# Altium PCB M2FS FLS Data Formatter 8_14_2012 centroid.PcbDoc (part 1 of 3)
Units mil, origin at the board's own origin, x right, y up, seen from the top; angles counter-clockwise.
Board outline 3350 x 3370 mil, 8 copper layers (Top Layer, Internal Plane 1, Mid-Layer 1, Mid-Layer 2, MidLayer3, Mid-Layer 4, Internal Plane 2, Bottom Layer); 141 components, 138 nets, 814 pads, 61 vias.
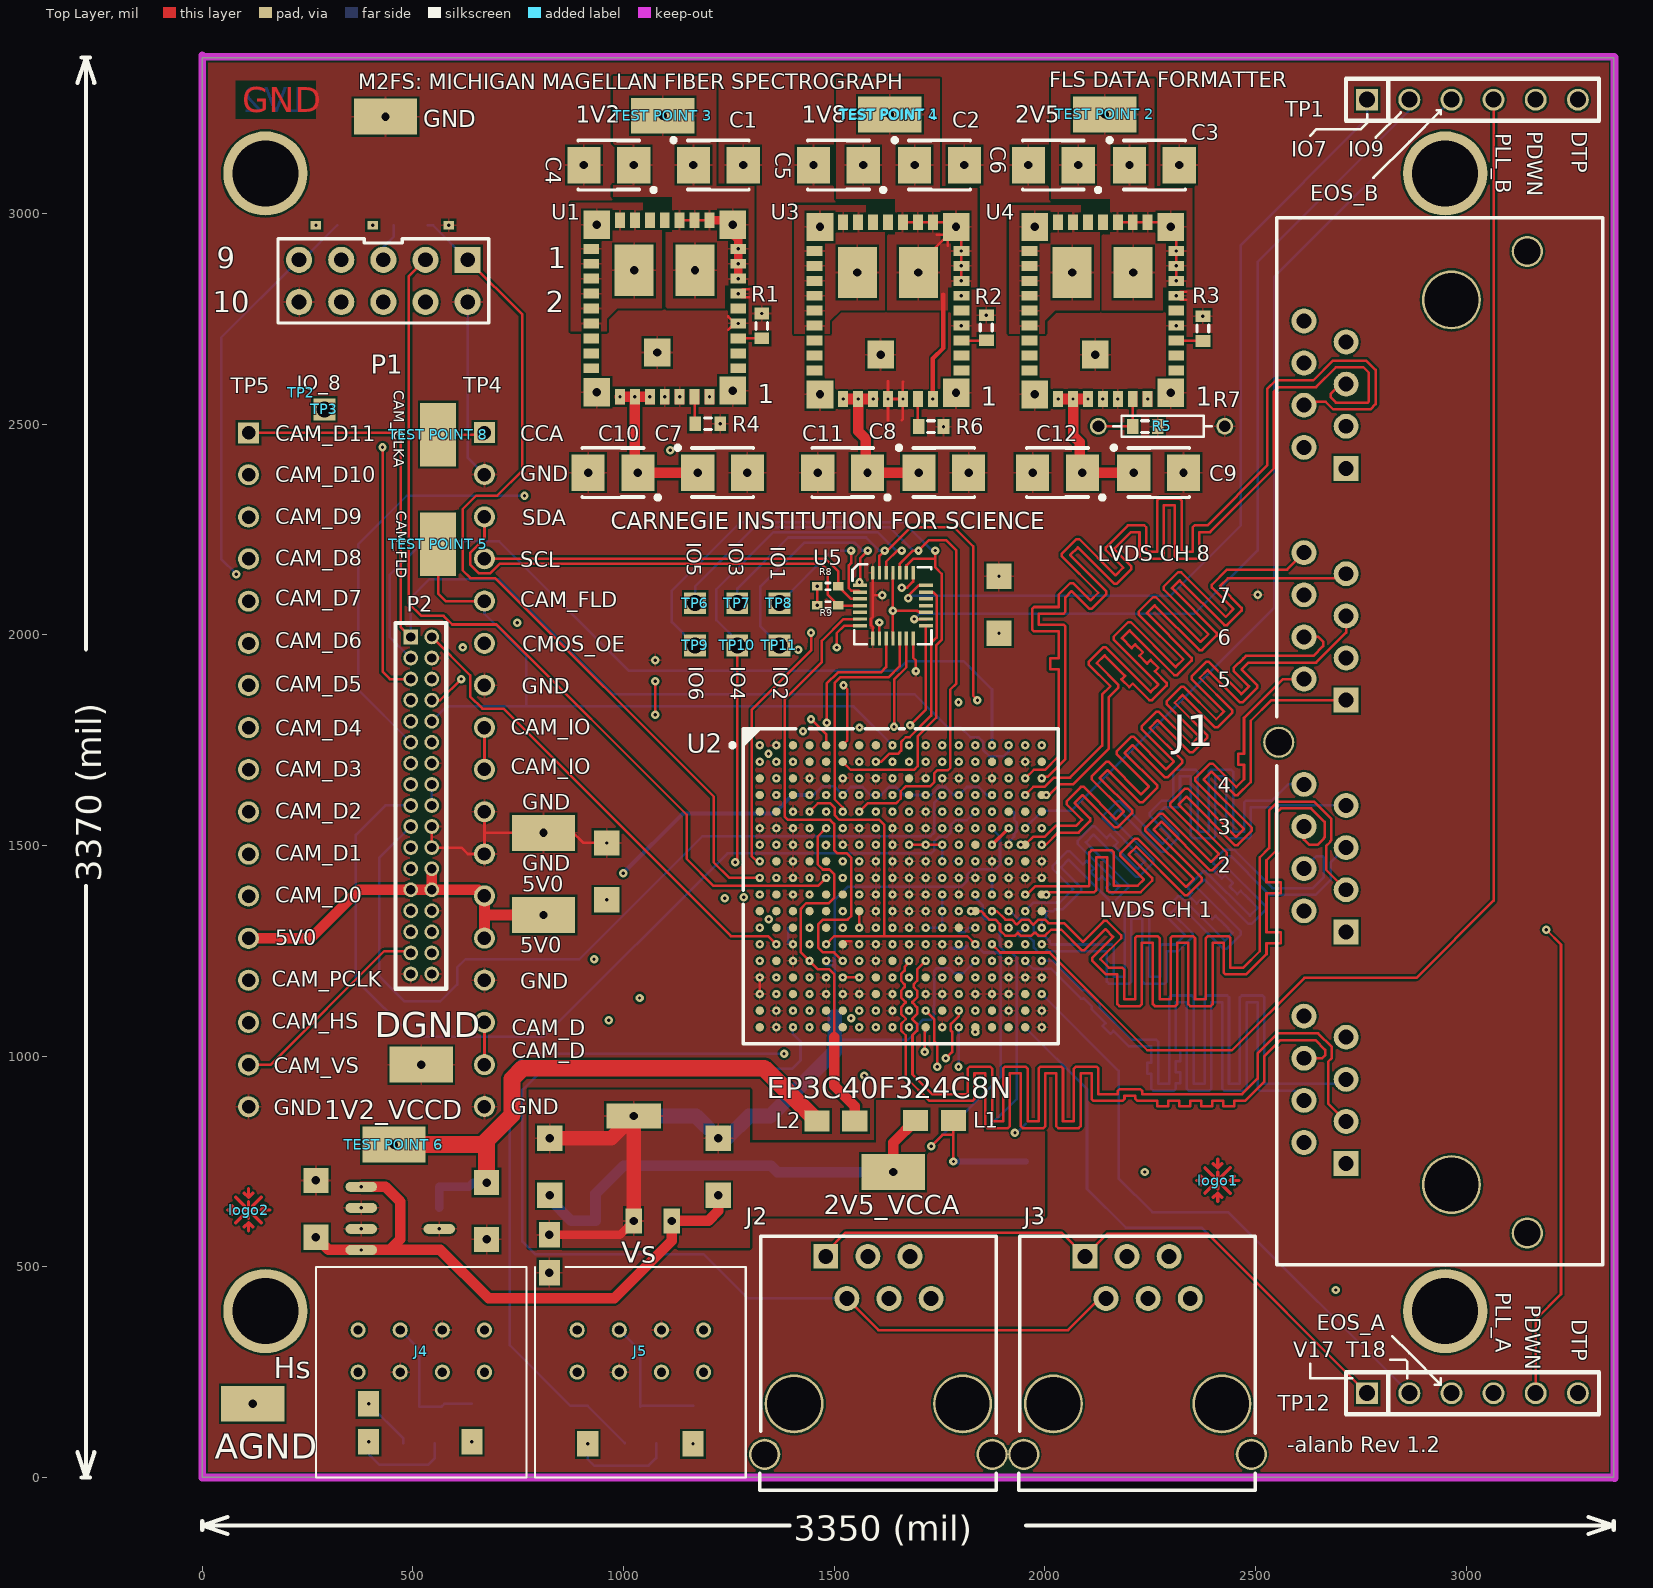
[diagram p0: Top Layer view]
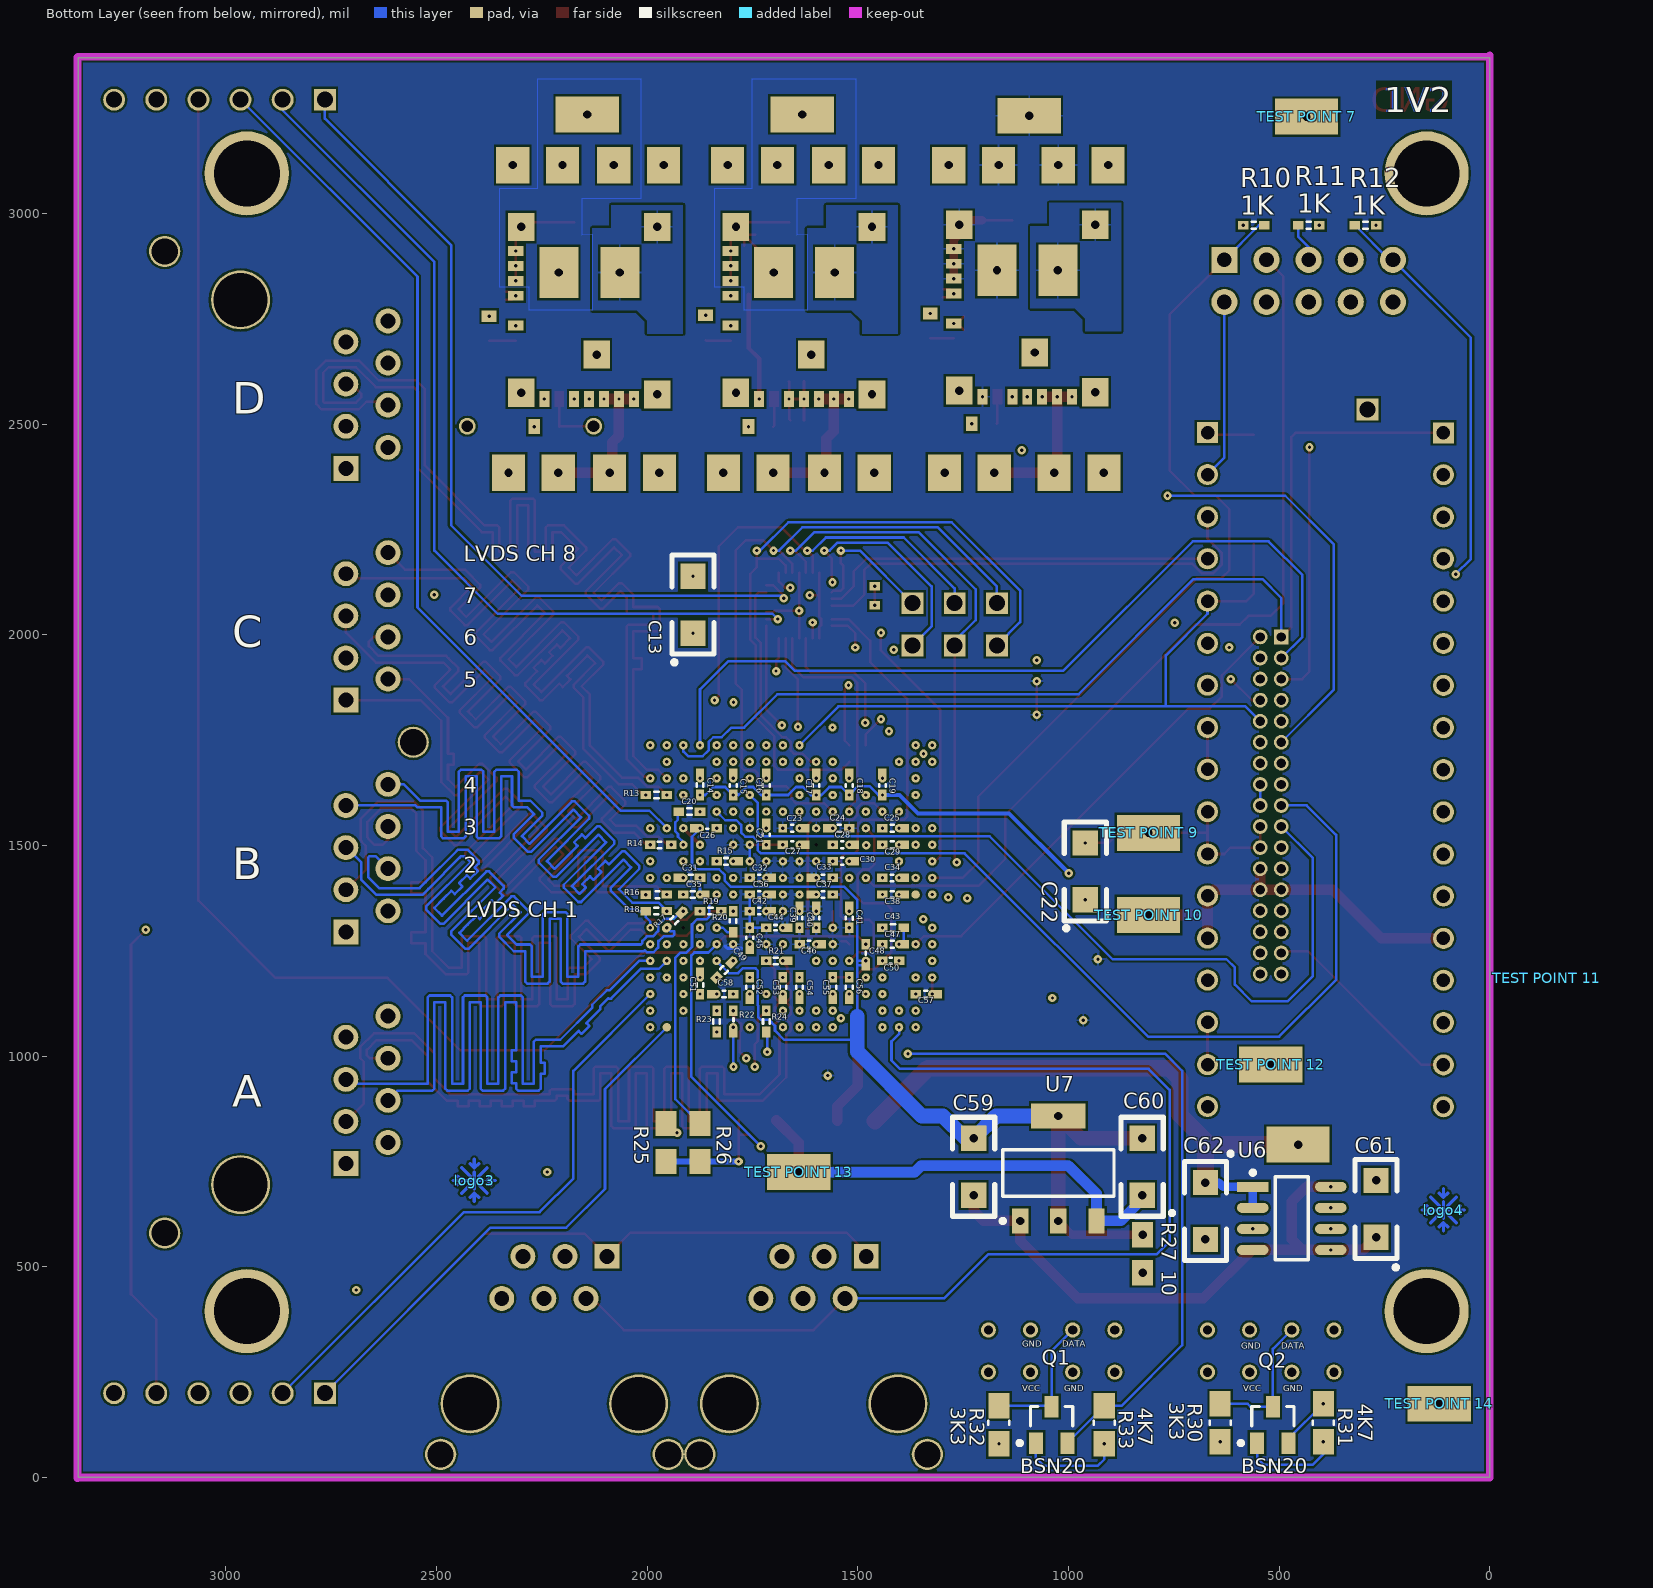
[diagram p1: Bottom Layer view, seen from below]
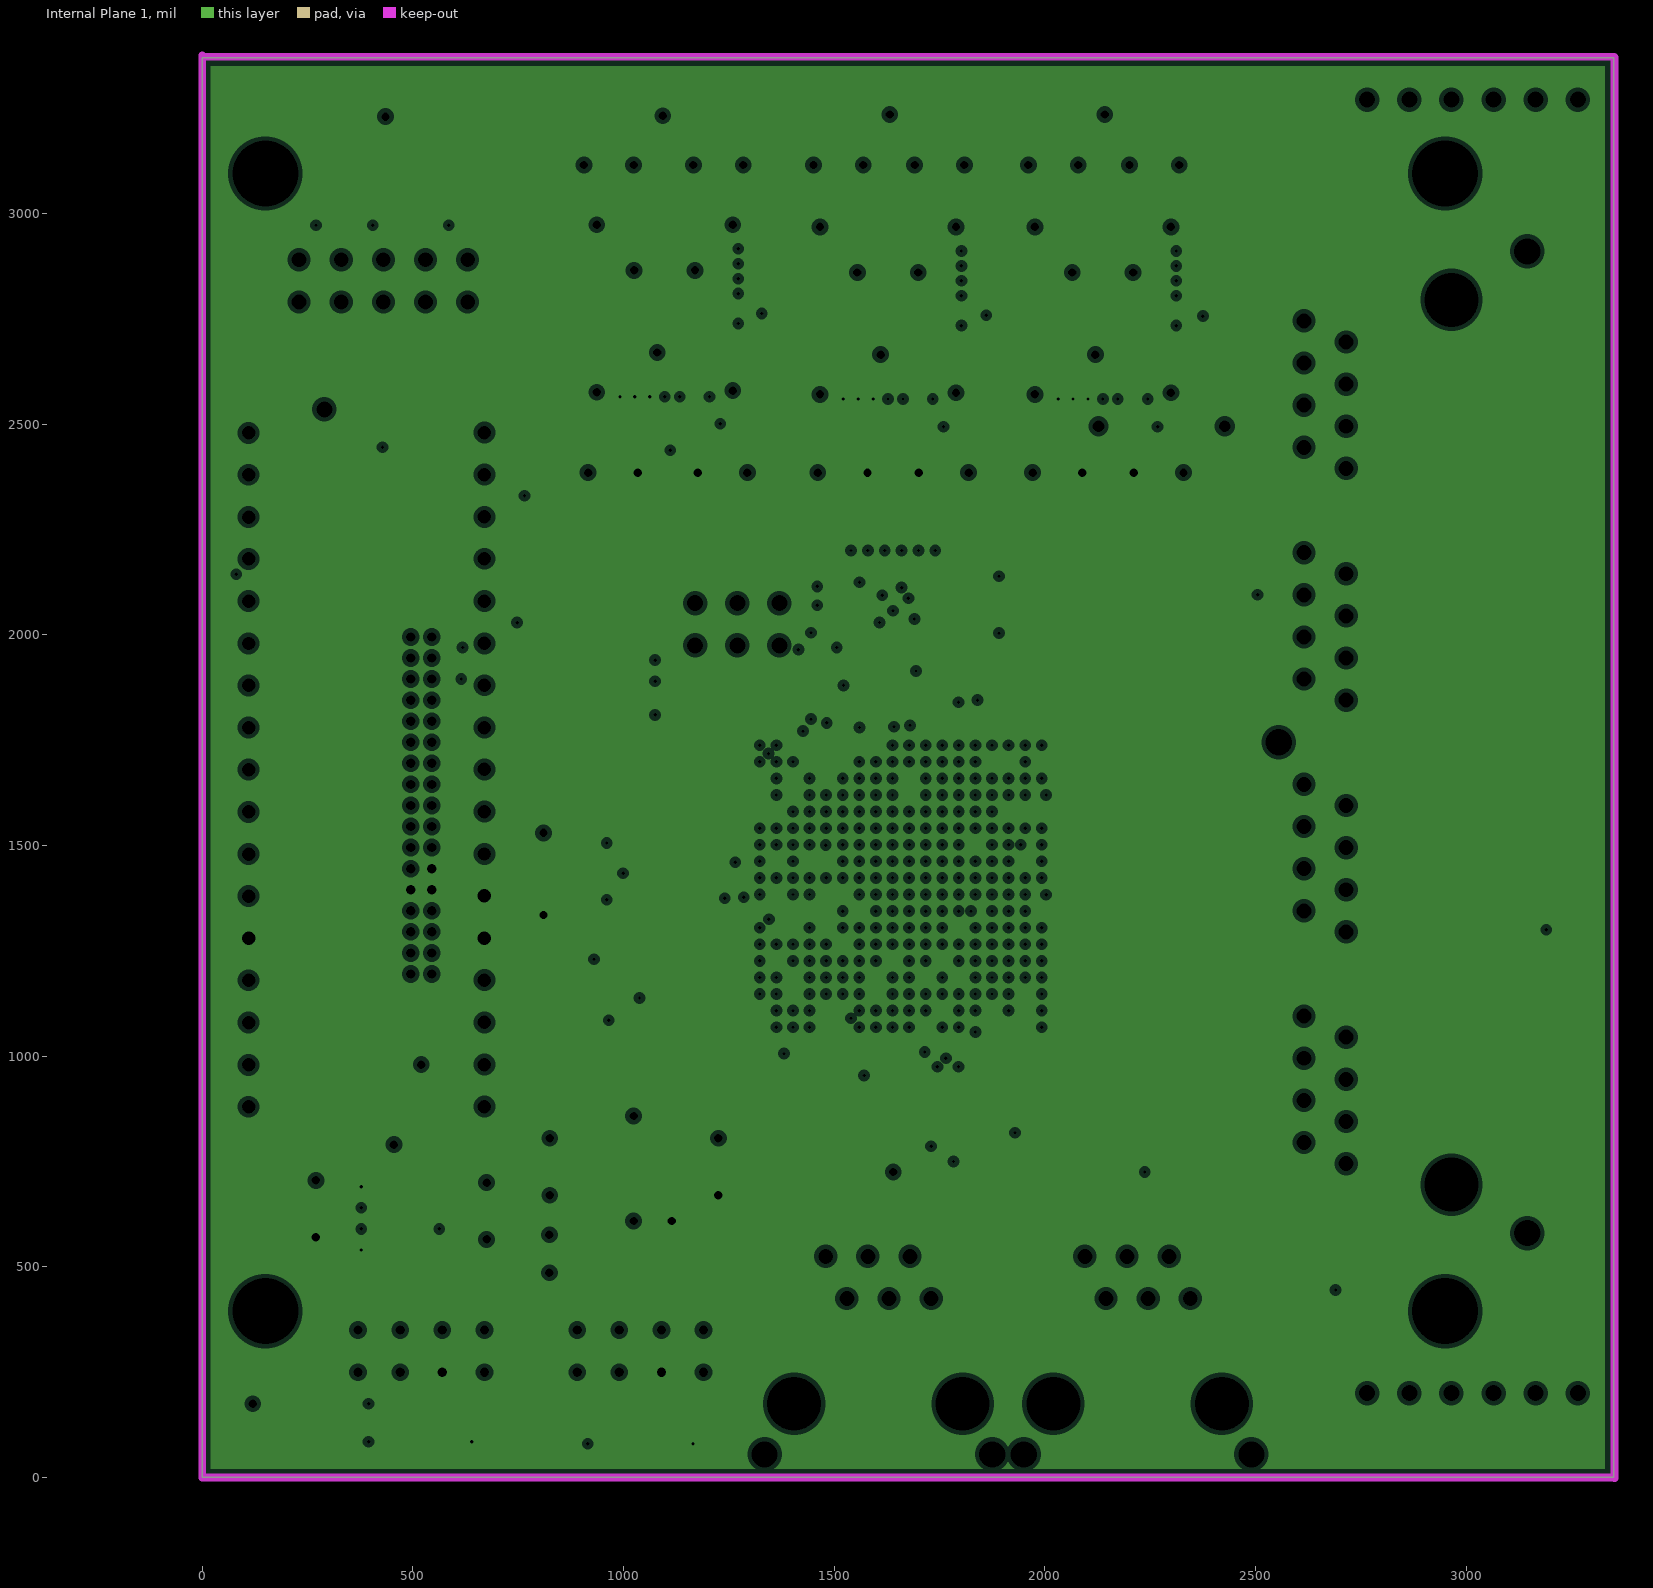
[diagram p2: Internal Plane 1, clearances drawn from the general rule]
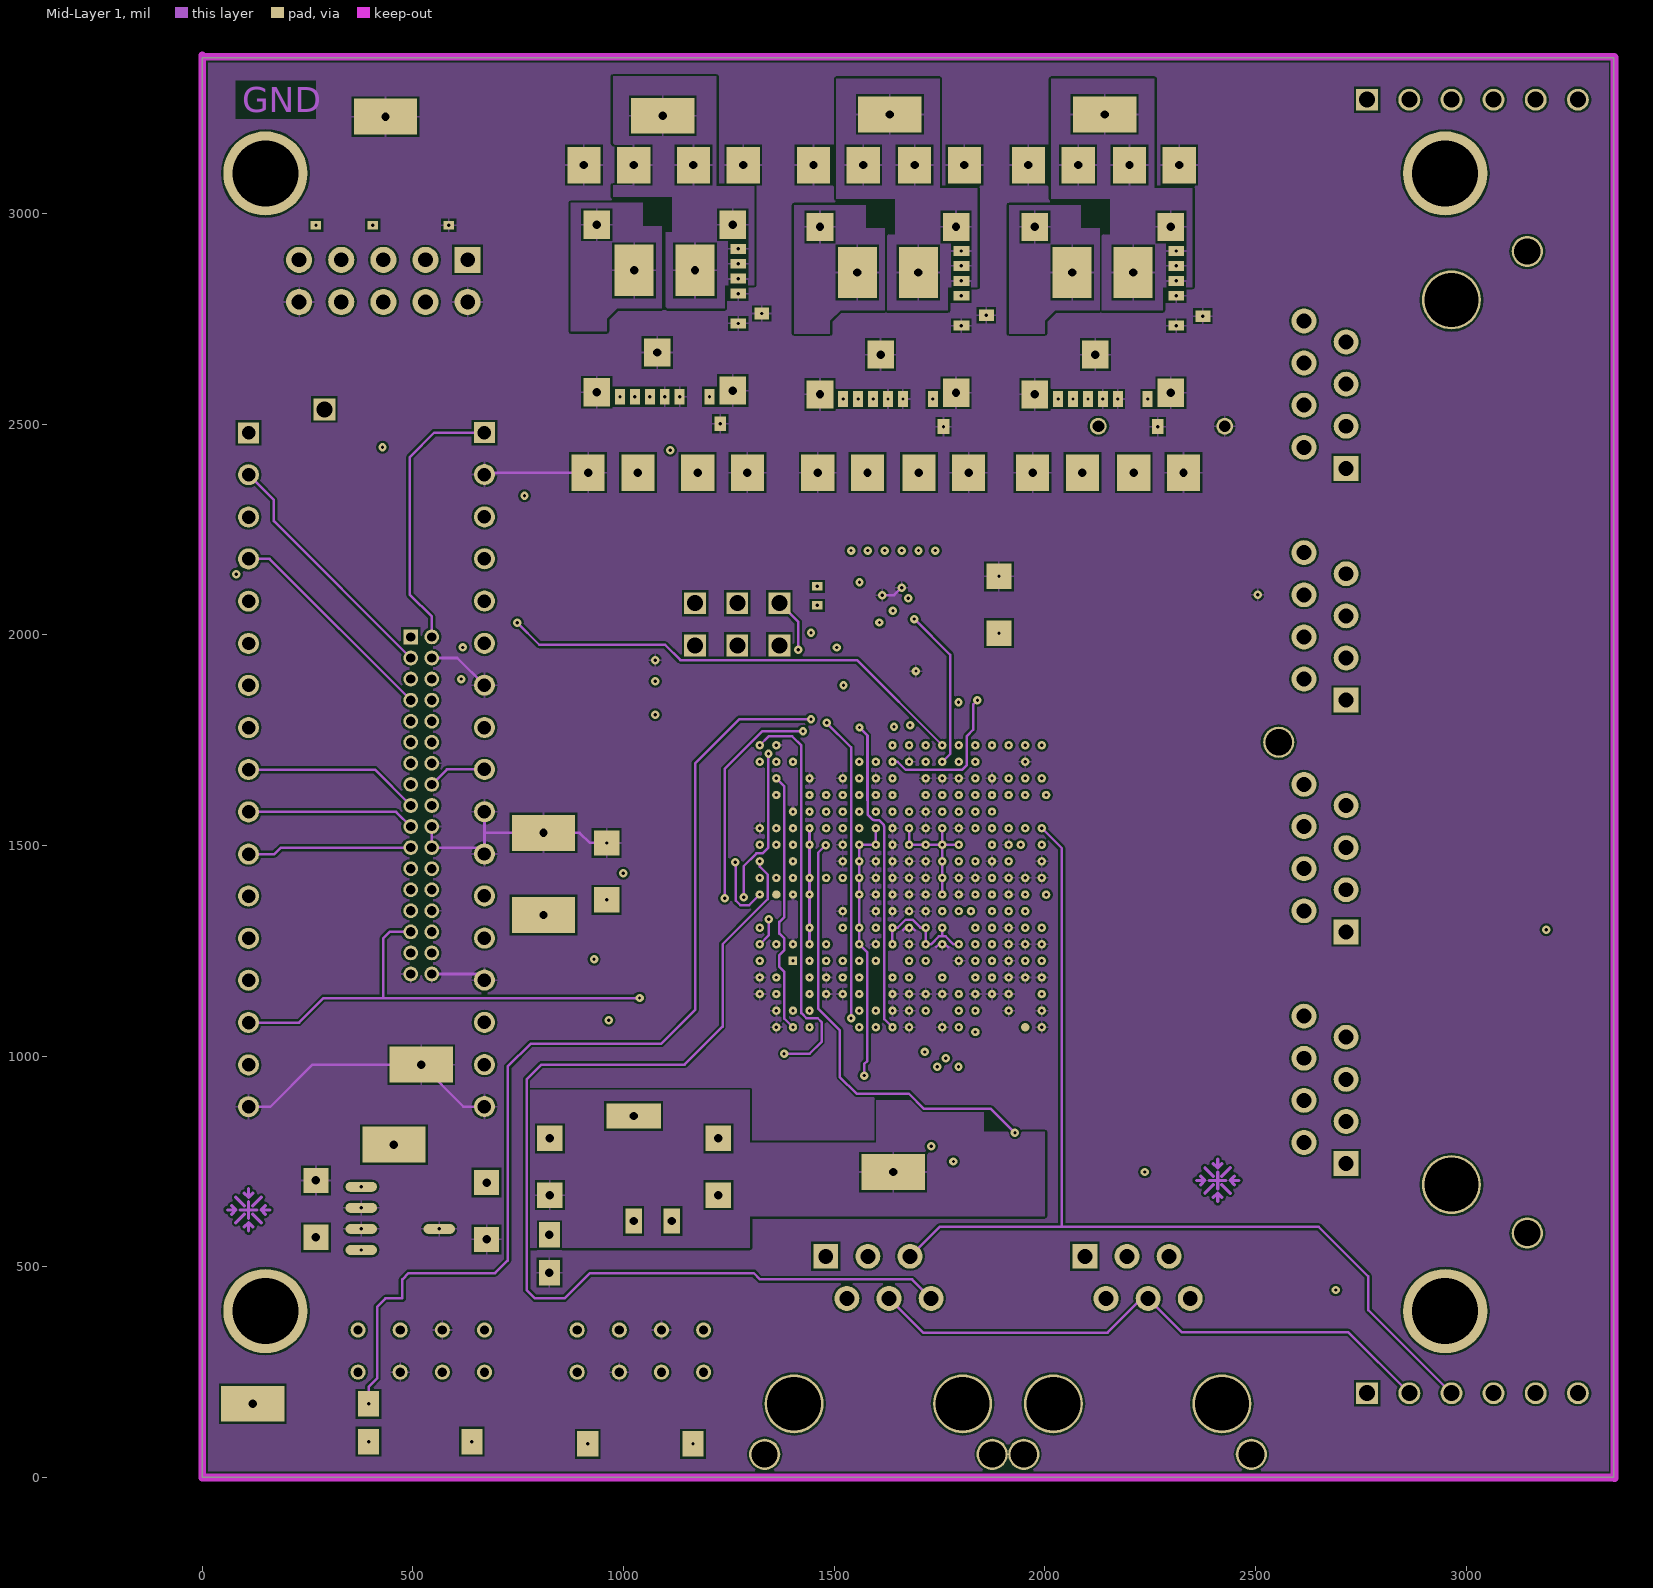
[diagram p3: Mid-Layer 1]
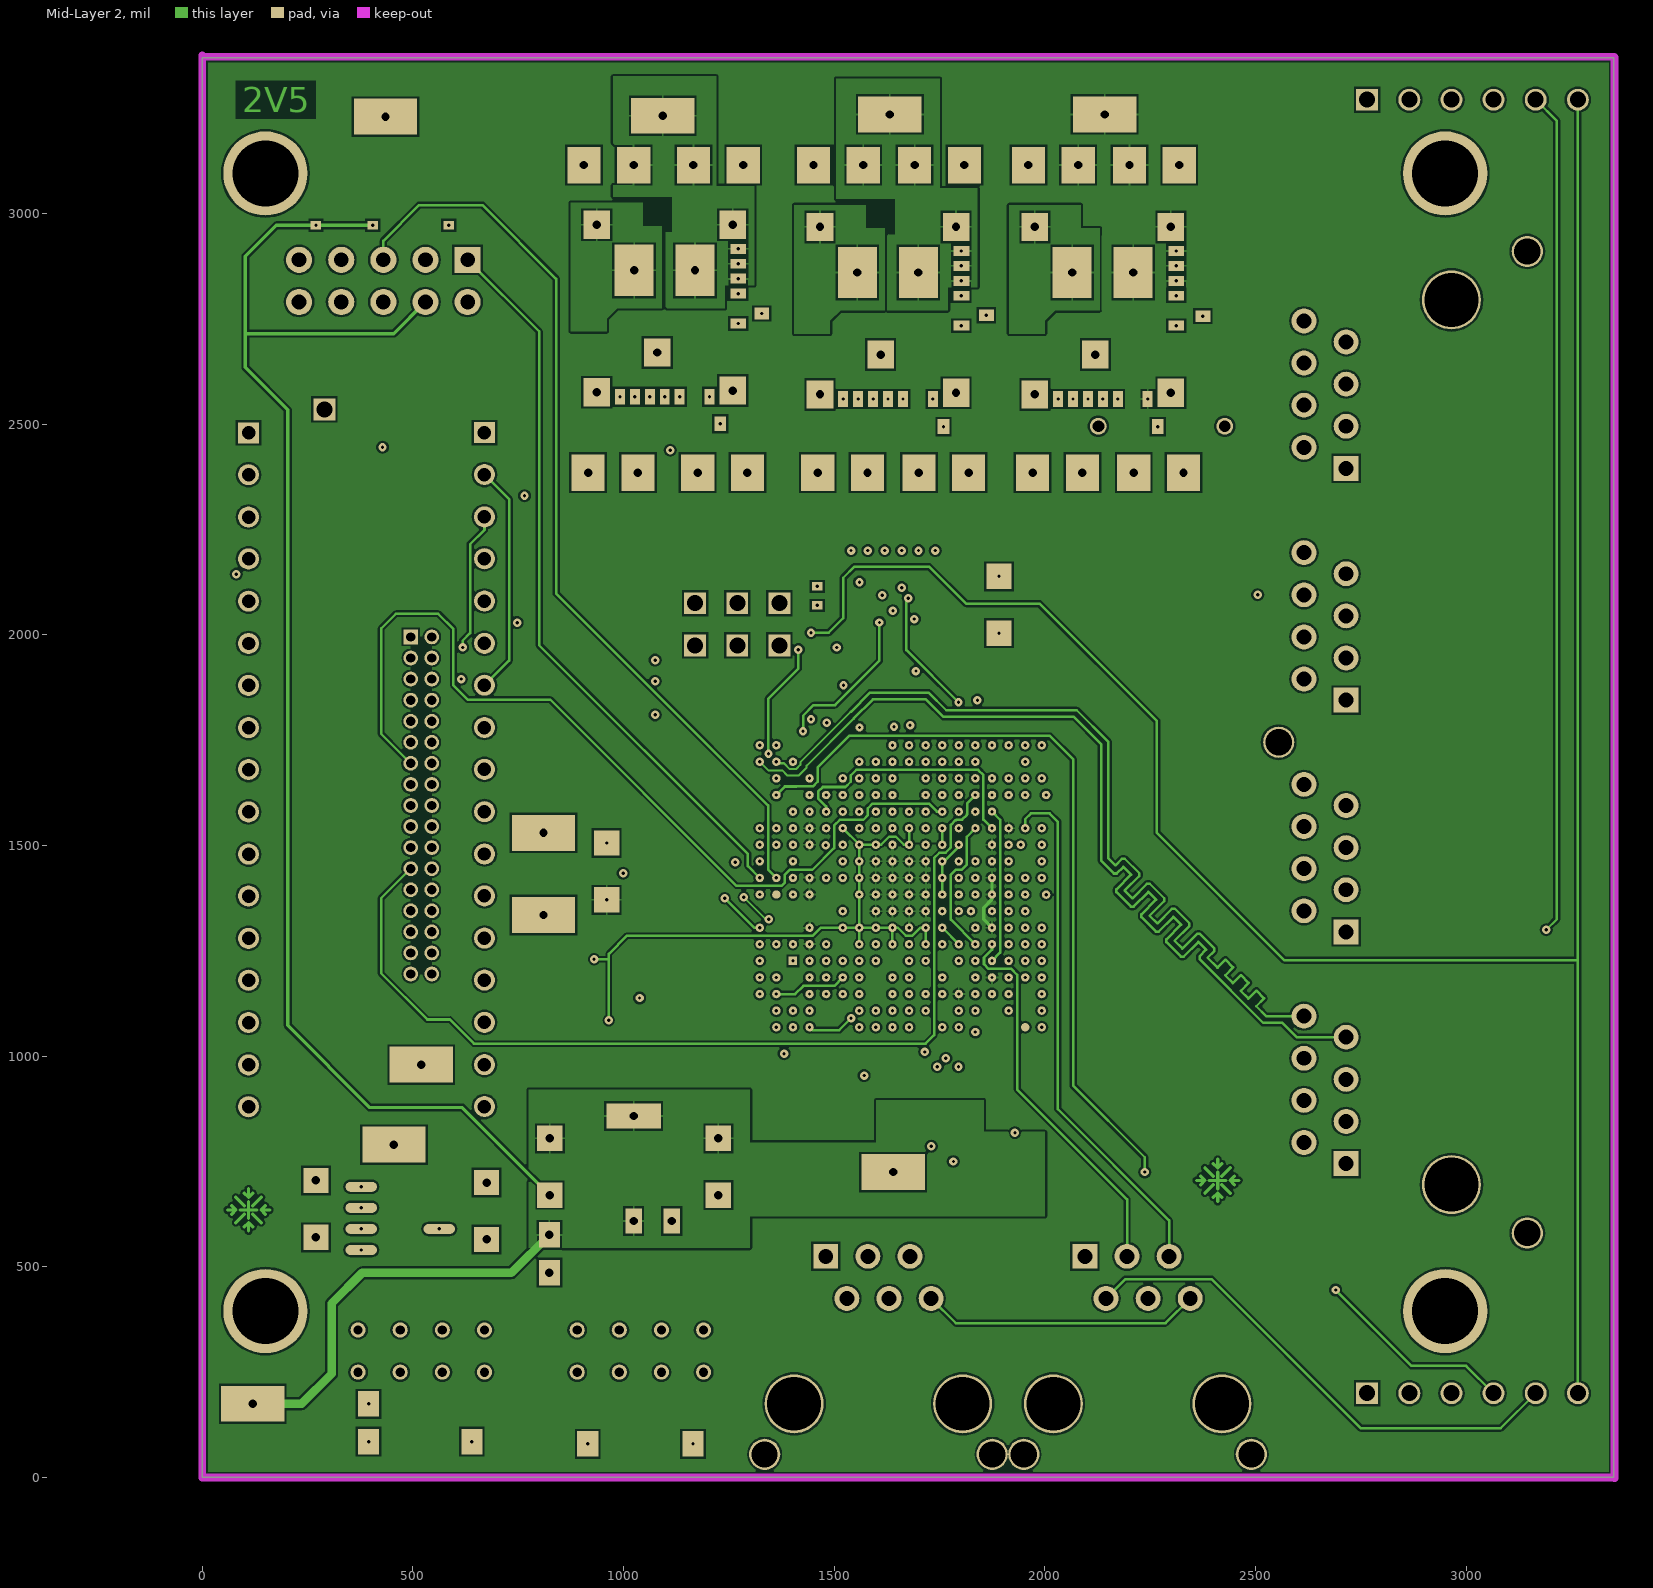
[diagram p4: Mid-Layer 2]
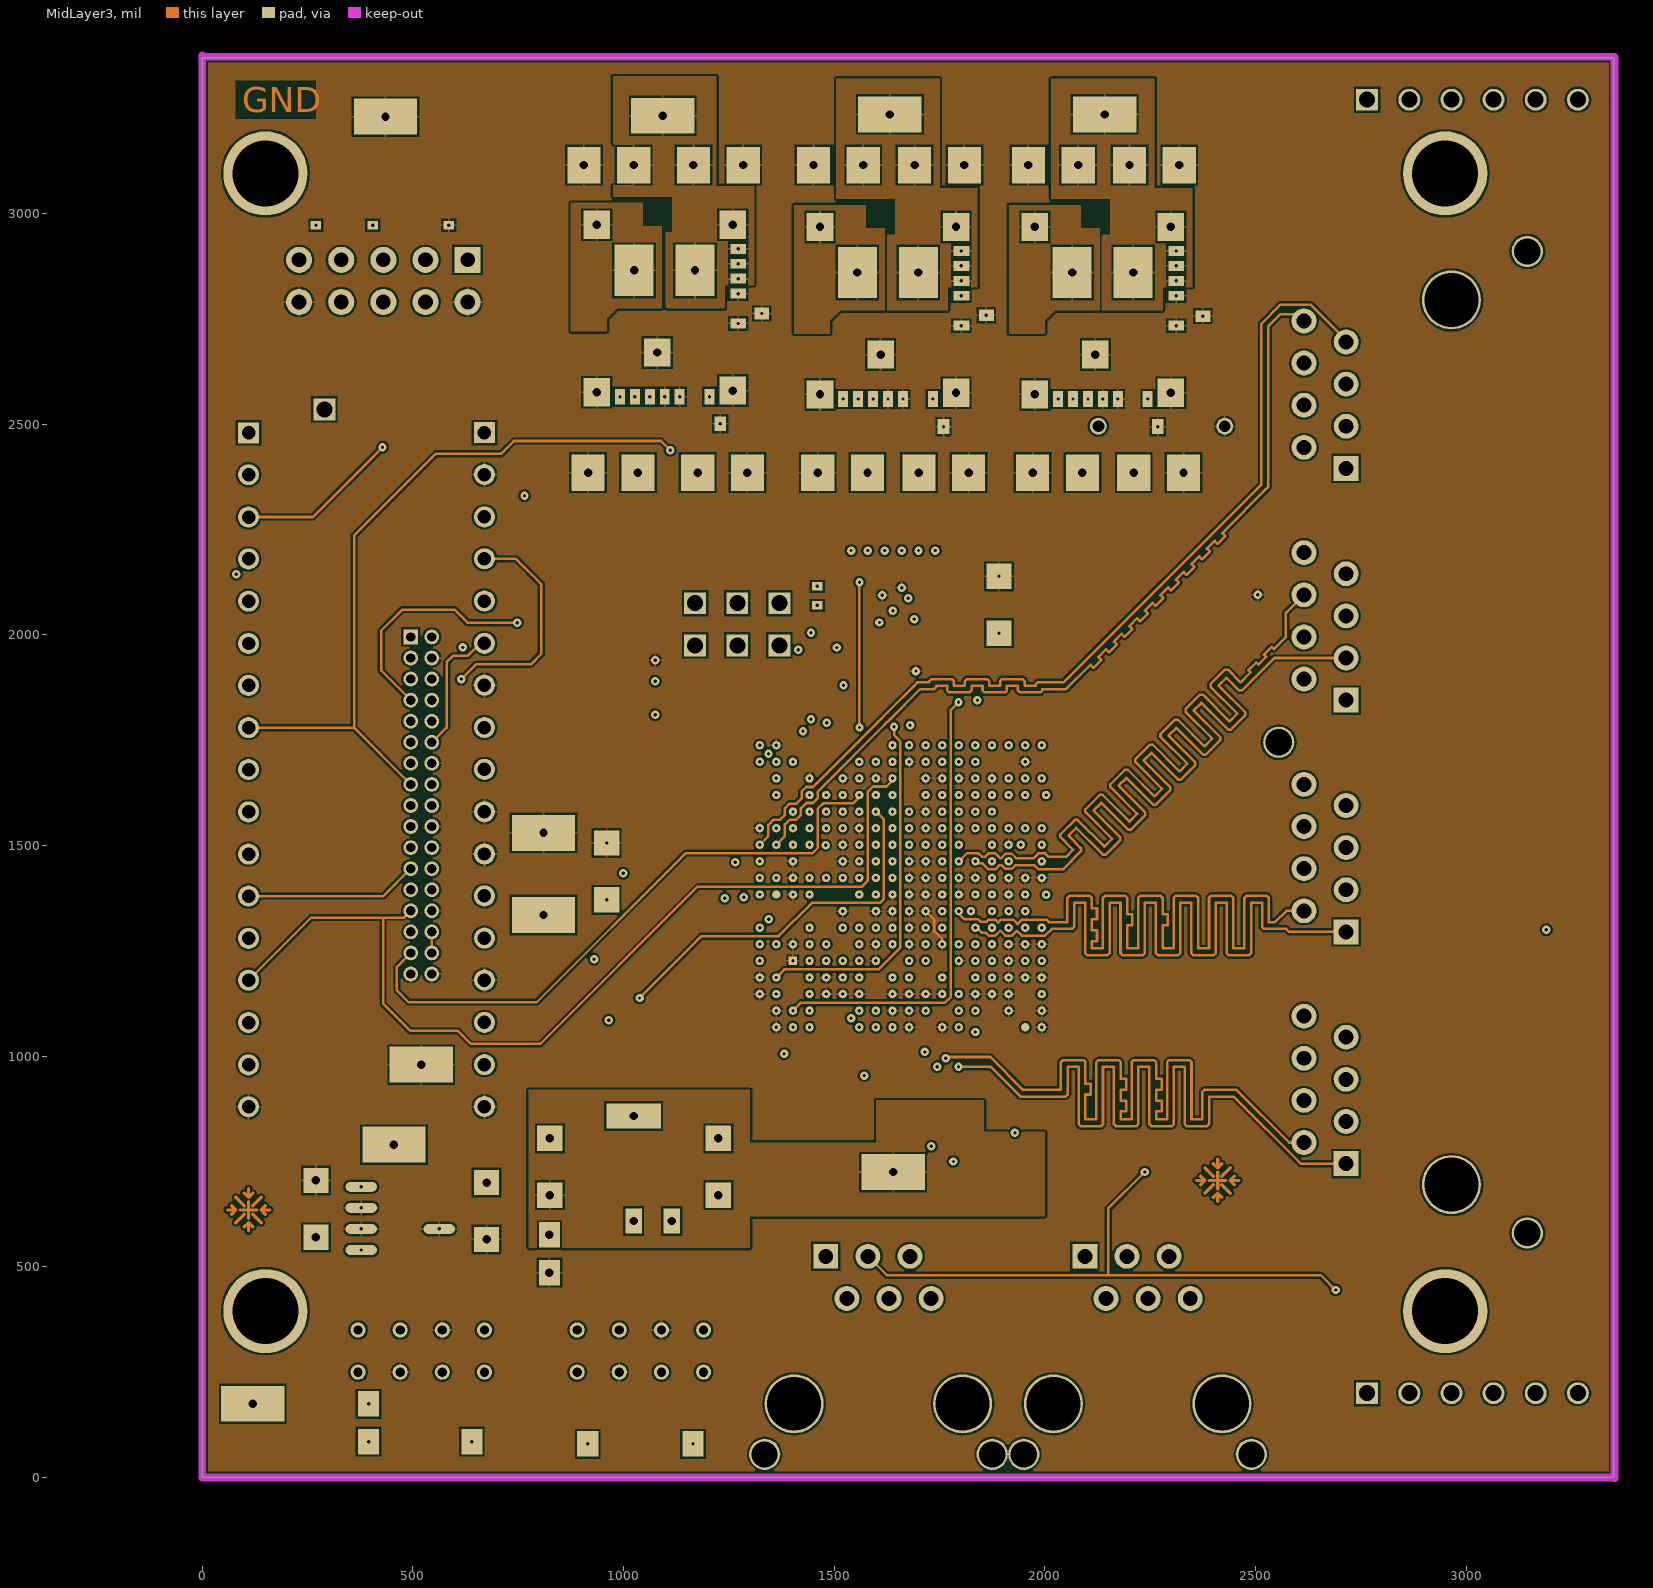
[diagram p5: MidLayer3]
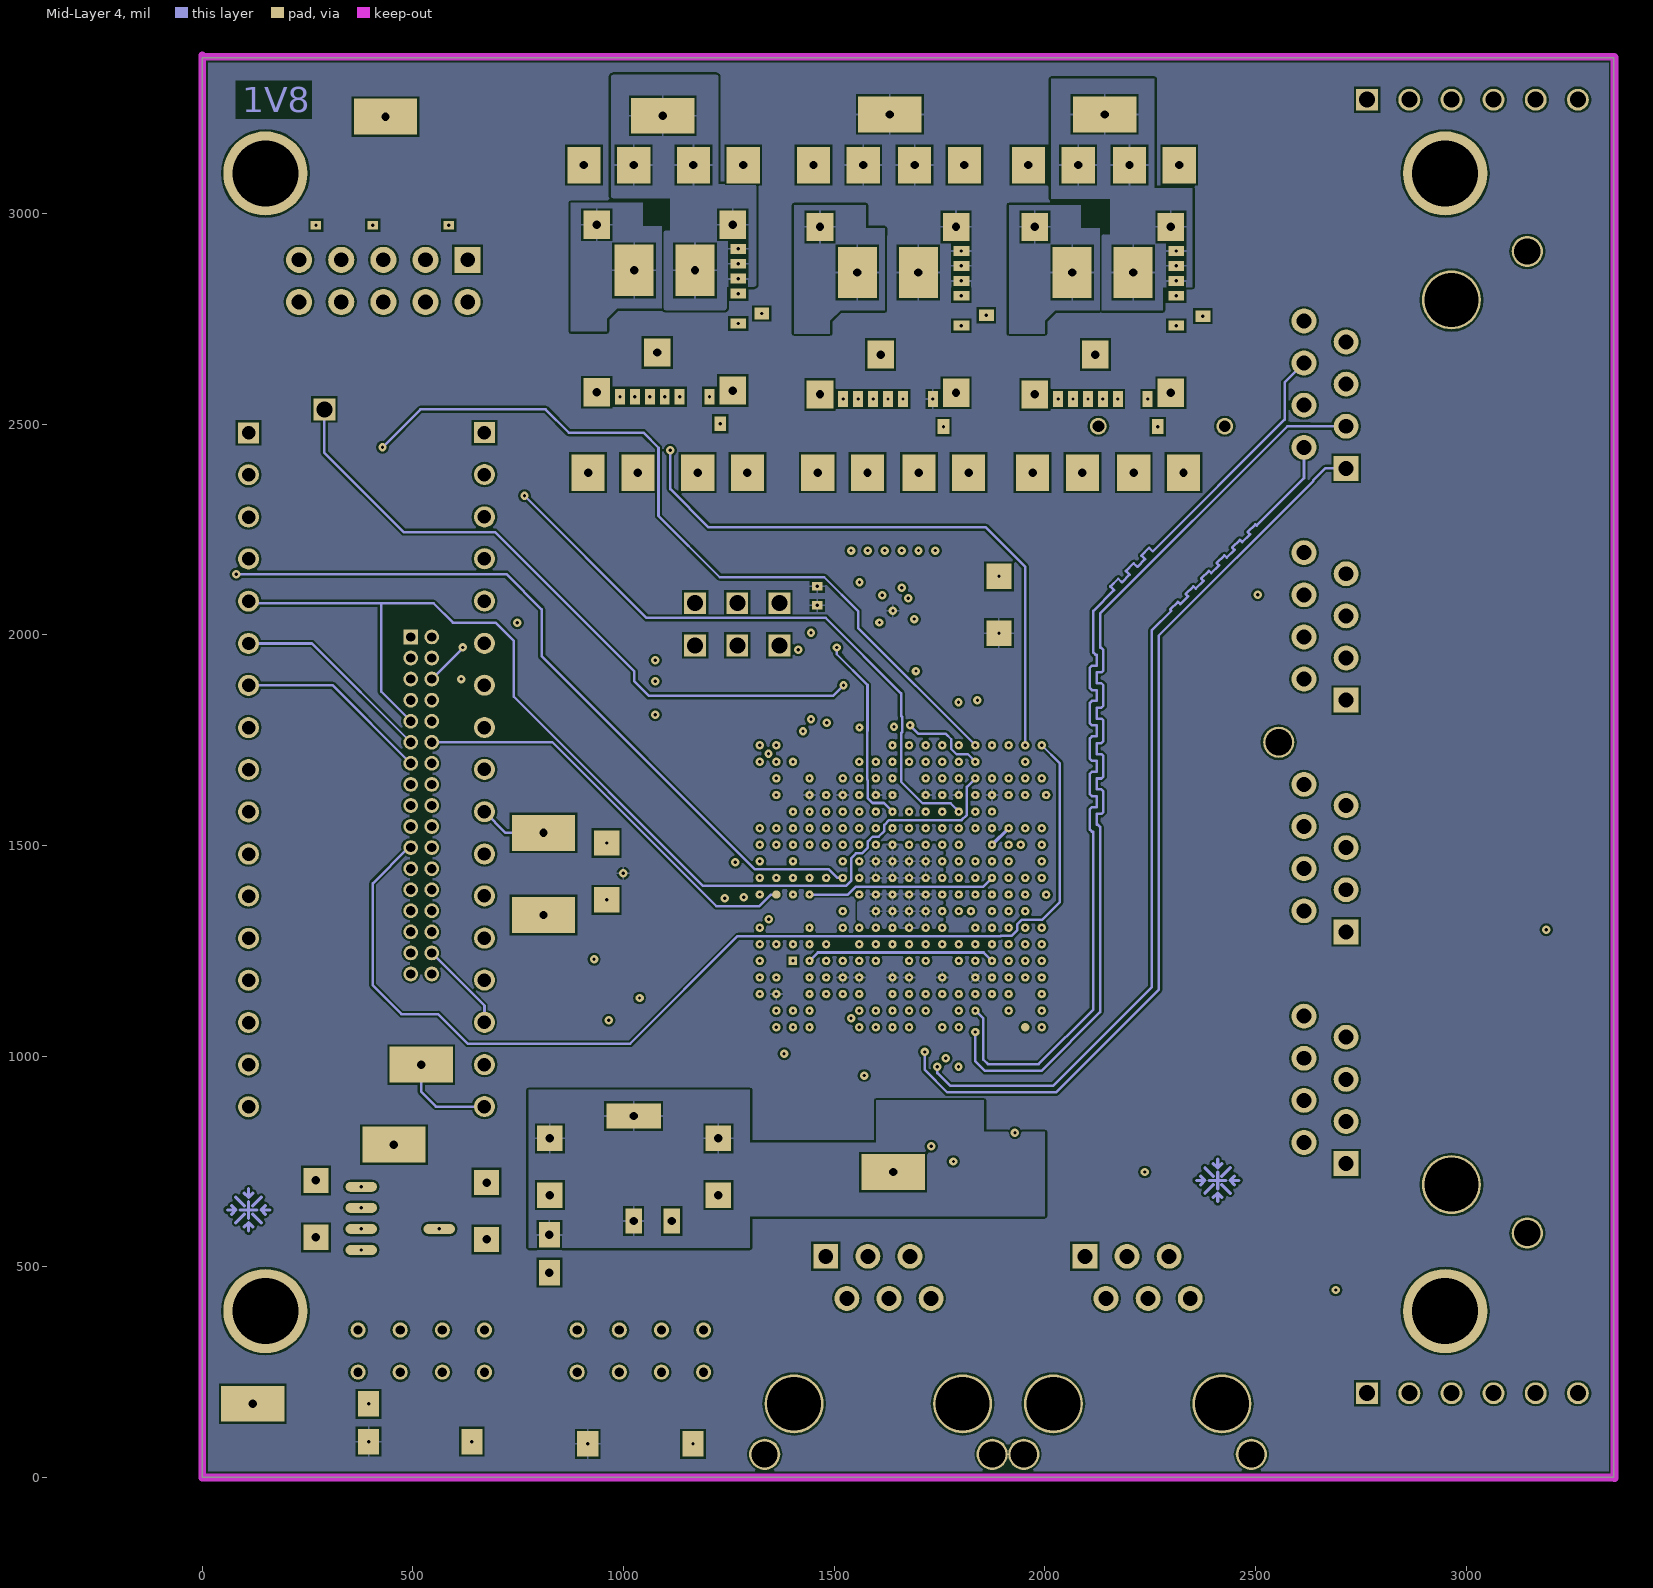
[diagram p6: Mid-Layer 4]
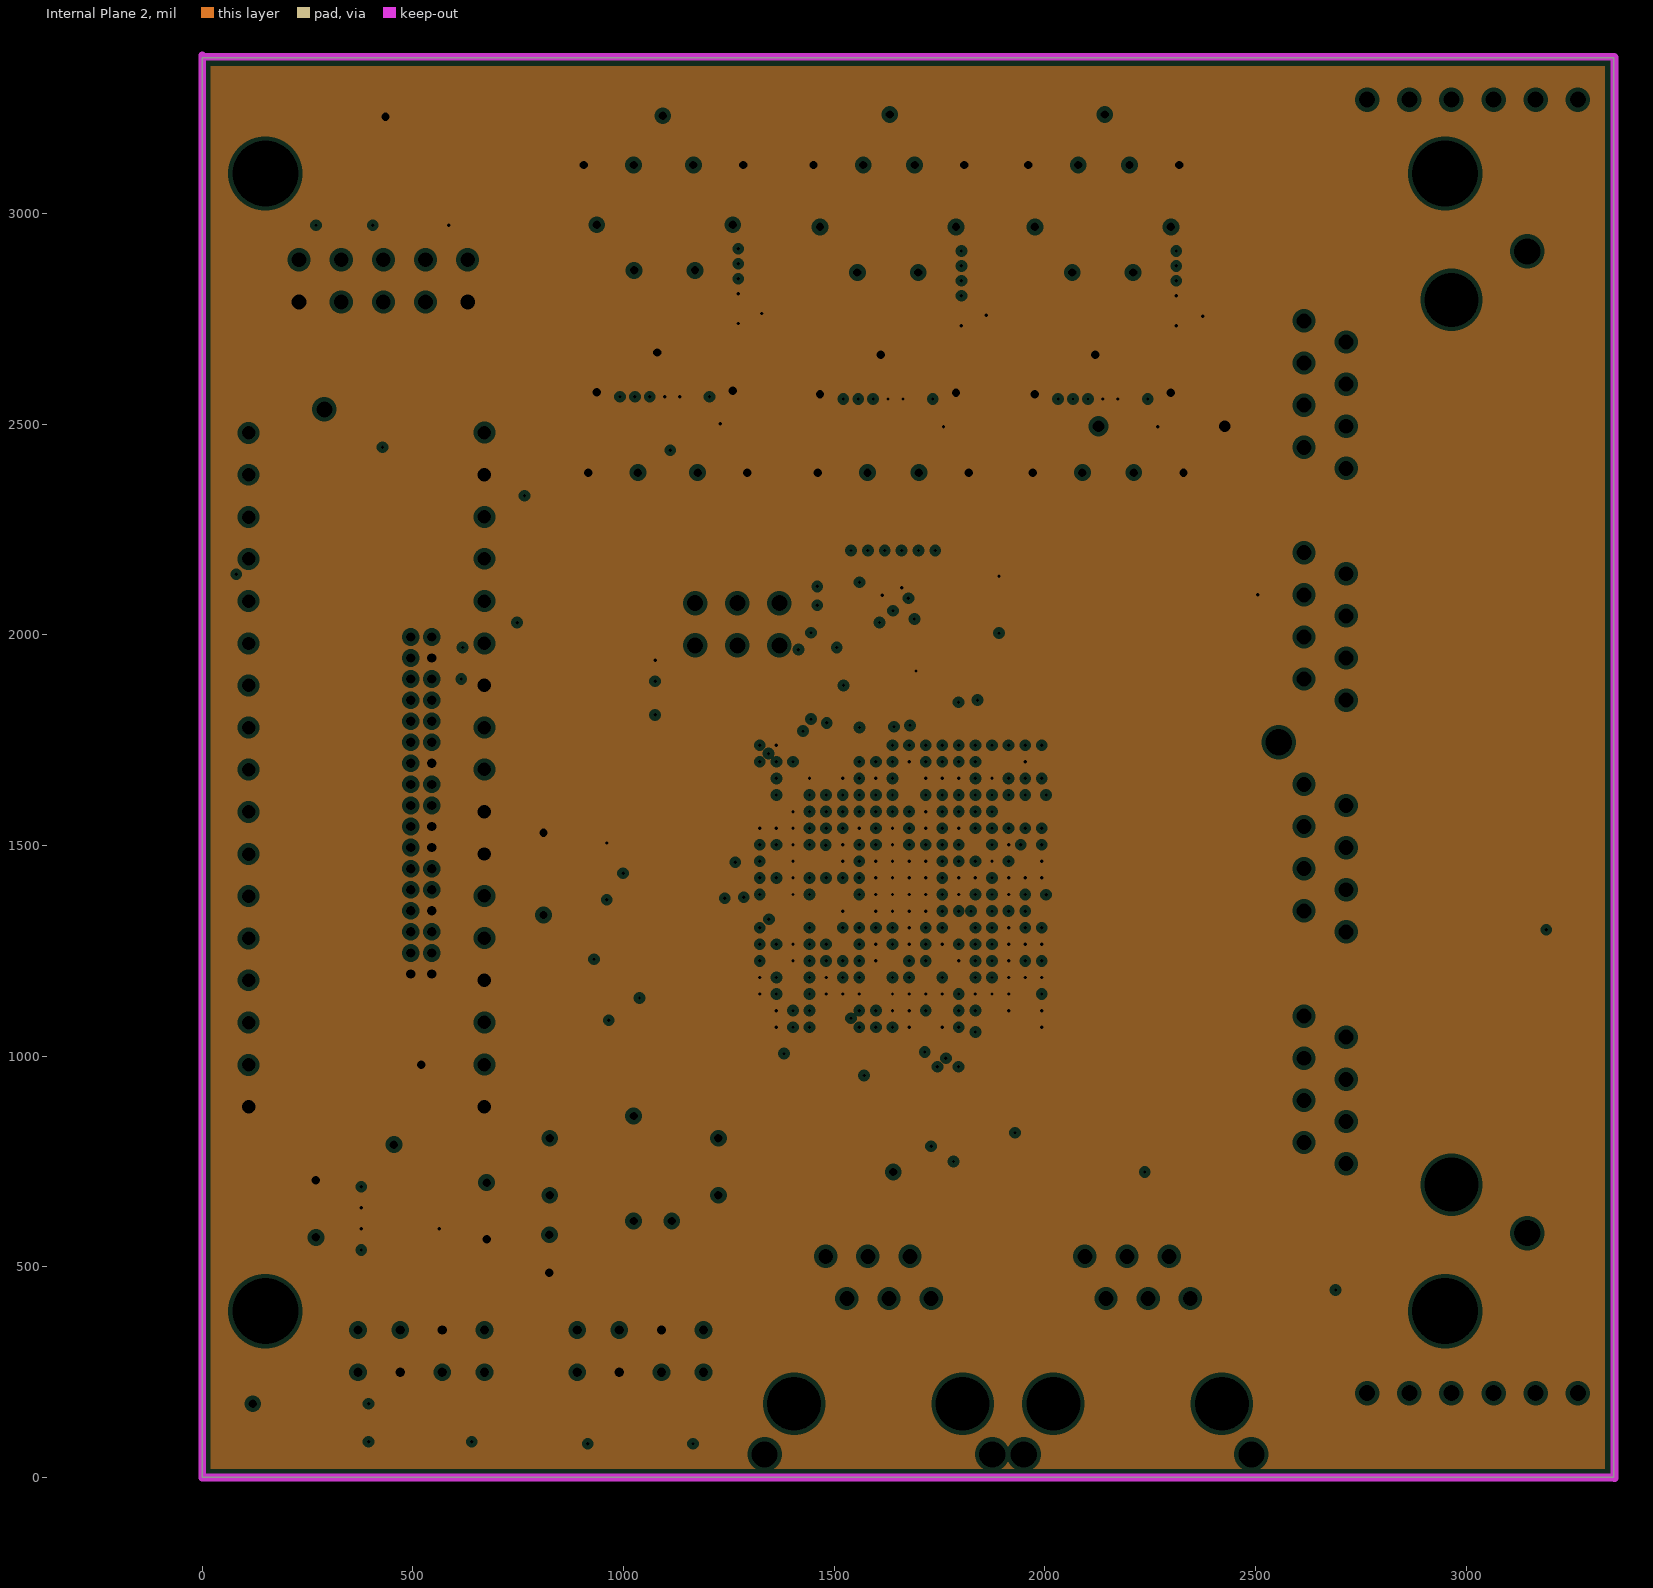
[diagram p7: Internal Plane 2, clearances drawn from the general rule]

## Layer stack, top to bottom
Top Layer: signal copper 1.4
Dielectric: prepreg 12.6, FR-4, Dk 4.8
Internal Plane 1: plane copper 1.4, net 5V0
Dielectric: core 12.6, FR-4, Dk 4.8
Mid-Layer 1: signal copper 1.4
Dielectric: prepreg 12.6, FR-4, Dk 4.8
Mid-Layer 2: signal copper 1.4
Dielectric: core 12.6, FR-4, Dk 4.8
MidLayer3: signal copper 1.4
Dielectric: prepreg 12.6, FR-4, Dk 4.8
Mid-Layer 4: signal copper 1.4
Dielectric: core 12.6, FR-4, Dk 4.8
Internal Plane 2: plane copper 1.4, net GND
Dielectric: prepreg 12.6, FR-4, Dk 4.8
Bottom Layer: signal copper 1.4

## Board outline
0,0 3350,0 3350,3370 0,3370

## Design rules (kind name [scope] priority, off if disabled: settings)
AssemblyTestpoint [(IsPad And (OnTopLayer Or OnBottomLayer)) Or (IsVia) Or (IsPad And OnMultiLayer)] p1: testpointundercomponent=TRUE minsize=10 maxsize=100 preferedsize=60 minholesize=0 maxholesize=40 preferedholesize=32 testpointgrid=1 usegrid=TRUE gridtolerance=0.01 allowsidebottom=TRUE
Clearance "Stitching GND" [IsStitchingVia and InNet('GND') vs (IsVia and (Not IsStitchingVia)) Or IsPad] p1: gap=50
Clearance [All] p2: gap=5
ComponentClearance [All] p1: gap=0 collisioncheckmode=3 verticalgap=0 showdistances=FALSE
DiffPairsRouting [(InDifferentialPairClass('All Differential Pairs'))] p1: maxlimit=10 minlimit=8 mostfreqgap=10 maxuncoupledlength=500
HoleSize [All] p1: absolutevalues=TRUE maxlimit=250 minlimit=1 maxpercent=80.000 minpercent=20.000
HoleToHoleClearance [All] p1: gap=6 allowstackedmicrovias=TRUE
Length All [All] p1: maxlimit=12000 minlimit=0
MatchedLengths [InNetClass('LVDS')] p1: tolerance=500 checknetsindiffpair=TRUE checkdiffpairvsdiffpair=TRUE checkothers=TRUE
MinimumAnnularRing [All] p1: minimumring=5.6
MinimumSolderMaskSliver [All] p1: minsoldermaskwidth=0.1
PlaneClearance [All] p1: clearance=10
PlaneConnect PlaneConnect_2 [(InNet('GND') AND InComponent('U2') AND HasFootprint('FBGA324'))] p1: planeconnectstyle=Relief reliefexpansion=5 reliefentries=4 reliefconductorwidth=10 reliefairgap=5
PlaneConnect PlaneConnect_1 [(InNet('5V0') AND HasFootprint('CON34_.05X.05'))] p2: planeconnectstyle=Relief reliefexpansion=5 reliefentries=4 reliefconductorwidth=10 reliefairgap=5
PlaneConnect [All] p3: planeconnectstyle=Relief reliefexpansion=5 reliefentries=4 reliefconductorwidth=10 reliefairgap=5
PolygonConnect [All] p1: connectstyle=Relief reliefconductorwidth=5 reliefentries=4 polygonreliefangle="90 Angle" airgapwidth=5
RoutingVias [All] p1: holewidth=8 width=20 viastyle="Through Hole" minholewidth=8 minwidth=20 maxholewidth=40 maxwidth=60
SilkToSilkClearance [All] p1: silktosilkclearance=1
SilkscreenOverComponentPads [All] p1: minsilkscreentomaskgap=1
SolderMaskExpansion SolderMaskExpansion_1 [All] p1: expansion=4
Width Width_All [All] p1: maxlimit=60 minlimit=5 preferedwidth=6
Width "Width Power" [All] p2: maxlimit=50 minlimit=6 preferedwidth=50
18 further rules are at their usual default settings.

## Classes and differential pairs
component class "Power Supply": C1 C2 C3 C4 C5 C6 C7 C8 C9 C10 C11 C12 C26 C31 C43 C60 R2 R3 R6 R7 R8 R10 U4 U7
component class "FLS data formatter 4_21_2012": C1 C2 C3 C4 C5 C6 C7 C8 C9 C10 C11 C12 C14 C15 C16 C17 C18 C19 C20 C21 C23 C24 C25 C26 C27 C28 C29 C30 C31 C32 C33 C34 C36 C37 C38 C39 C40 C41 C42 C43 C44 C45 C46 C47 C48 C49 C50 C52 C53 C54 C55 C56 C57 C58 C59 C60 C61 J1 J2 J3 J4 J5 logo1 logo2 logo3 logo4 P1 P2 R1 R2 R3 R4 R6 R7 R8 R9 R10 R11 R12 R16 R18 R21 R22 R26 R31 R32 "TEST POINT 1" "TEST POINT 2" "TEST POINT 3" "TEST POINT 4" "TEST POINT 6" "TEST POINT 8" "TEST POINT 12" "TEST POINT 13" "TEST POINT 14" TP4 TP10 TP12 U1 U2 U4 U5 U7
differential pair class LVDS: DATA_CLK DATA_CLK_OUT2 DATA_CLK_OUT!
net class LVDS: DATA_CLK_OUT_A_N DATA_CLK_OUT_A_P DATA_CLK_OUT_B_N DATA_CLK_OUT_B_P FRAME_CLK_OUT_A_N FRAME_CLK_OUT_A_P FRAME_CLK_OUT_B_N FRAME_CLK_OUT_B_P LVDS_CHANNEL_1_N LVDS_CHANNEL_1_P LVDS_CHANNEL_2_N LVDS_CHANNEL_2_P LVDS_CHANNEL_3_N LVDS_CHANNEL_3_P LVDS_CHANNEL_4_N LVDS_CHANNEL_4_P LVDS_CHANNEL_5_N LVDS_CHANNEL_5_P LVDS_CHANNEL_6_N LVDS_CHANNEL_6_P LVDS_CHANNEL_7_N LVDS_CHANNEL_7_P LVDS_CHANNEL_8_N LVDS_CHANNEL_8_P START_A_N START_A_P START_B_N START_B_P SYS_CLK1_N SYS_CLK1_P SYS_CLK2_N SYS_CLK2_P
differential pair LVDS_CHANNEL_8: +LVDS_CHANNEL_8_P -LVDS_CHANNEL_8_N
differential pair LVDS_CHANNEL_7: +LVDS_CHANNEL_7_P -LVDS_CHANNEL_7_N
differential pair LVDS_CHANNEL_6: +LVDS_CHANNEL_6_P -LVDS_CHANNEL_6_N
differential pair LVDS_CHANNEL_5: +LVDS_CHANNEL_5_P -LVDS_CHANNEL_5_N
differential pair LVDS_CHANNEL_4: +LVDS_CHANNEL_4_P -LVDS_CHANNEL_4_N
differential pair LVDS_CHANNEL_3: +LVDS_CHANNEL_3_P -LVDS_CHANNEL_3_N
differential pair LVDS_CHANNEL_2: +LVDS_CHANNEL_2_P -LVDS_CHANNEL_2_N
differential pair LVDS_CHANNEL_1: +LVDS_CHANNEL_1_P -LVDS_CHANNEL_1_N
differential pair SYS_CLK2: +SYS_CLK2_P -SYS_CLK2_N
differential pair SYS_CLK1: +SYS_CLK1_P -SYS_CLK1_N
differential pair DATA_CLK_OUT_A: +DATA_CLK_OUT_A_P -DATA_CLK_OUT_A_N
differential pair DATA_CLK_OUT_B: +DATA_CLK_OUT_B_P -DATA_CLK_OUT_B_N
differential pair FRAME_CLK_OUT_A: +FRAME_CLK_OUT_A_P -FRAME_CLK_OUT_A_N
differential pair FRAME_CLK_OUT_B: +FRAME_CLK_OUT_B_P -FRAME_CLK_OUT_B_N
differential pair START_A: +START_A_P -START_A_N
differential pair START_B: +START_B_P -START_B_N

## Components (designator, comment, footprint, x,y, rotation, side; value= is the part's Value field where it differs from the comment)
C1 "100uF" TC3528-1411 1225,3115 r0 top locked (schematic designator C48)
C2 "100 uF" TC3528-1411 1750,3115 r0 top locked (schematic designator C42)
C3 "100 uF" TC3528-1411 2260,3115 r0 top locked (schematic designator C35)
C4 "47uF" TC3528-1411 965,3115 r180 top locked (schematic designator C47)
C5 "47 uF" TC3528-1411 1510,3115 r180 top locked (schematic designator C41)
C6 "47 uF" TC3528-1411 2020,3115 r180 top locked (schematic designator C36)
C7 "220uF" TC3528-1411 1235,2385 r0 top locked (schematic designator C46)
C8 "220uF" TC3528-1411 1760,2385 r0 top locked (schematic designator C40)
C9 "220uF" TC3528-1411 2270,2385 r0 top locked (schematic designator C34)
C10 "47uF" TC3528-1411 975,2385 r180 top locked (schematic designator C45)
C11 "47uF" TC3528-1411 1520,2385 r180 top locked (schematic designator C39)
C12 "47uF" TC3528-1411 2030,2385 r180 top locked (schematic designator C33)
C13 "100uF" 1206#1 1891,2139 r270 bottom locked
C14 "0.1uF" "0402 slim"#1 1874.54,1619.85 r90 bottom locked (schematic designator C25)
C15 "0.1uF" "0402 slim"#1 1795.8,1619.85 r90 bottom locked
C16 "0.1uF" "0402 slim-B" 1717.06,1619.85 r90 bottom locked
C17 "0.1uF" "0402 slim"#1 1598.95,1619.85 r90 bottom locked (schematic designator C27)
C18 "0.1uF" "0402 slim-B" 1520.2,1619.85 r90 bottom locked (schematic designator C22)
C19 "0.1uF" "0402 slim"#1 1441.46,1619.85 r90 bottom locked (schematic designator C21)
C20 "0.1uF" "0402 slim-B" 1874.54,1580.48 r0 bottom locked (schematic designator C29)
C21 "0.1uF" "0402 slim"#1 1717.06,1501.74 r90 bottom locked (schematic designator C16)
C22 "100uF" 1206#1 960,1506 r270 bottom locked
C23 "0.1uF" "0402 slim-B" 1677.69,1541.11 r180 bottom locked (schematic designator C28)
C24 "0.1uF" "0402 slim"#1 1520.2,1541.11 r0 bottom locked (schematic designator C11)
C25 "0.1uF" "0402 slim"#1 1441.46,1541.11 r180 bottom locked
C26 "0.1uF" "0402 slim"#1 1835.17,1541.11 r0 bottom locked (schematic designator C40)
C27 "0.1uF" "0402 slim"#1 1677.69,1501.74 r180 bottom locked (schematic designator C15)
C28 "0.1uF" "0402 slim-B" 1559.57,1501.74 r180 bottom locked (schematic designator C26)
C29 "0.1uF" "0402 slim"#1 1441.46,1501.74 r180 bottom locked
C30 "0.1uF" "0402 slim-B" 1559.57,1462.37 r180 bottom locked
C31 "0.1uF" "0402 slim"#2 1924.54,1423 r180 bottom locked
C32 "0.1uF" "0402 slim-B" 1756.43,1423 r180 bottom locked (schematic designator C6)
C33 "0.1uF" "0402 slim-B" 1559.57,1423 r0 bottom locked
C34 "0.1uF" "0402 slim"#1 1441.46,1423 r180 bottom locked
C35 "0.1uF" "0402 slim"#2 1863.91,1383.63 r0 bottom locked
C36 "0.1uF" "0402 slim"#1 1756.43,1383.63 r180 bottom locked (schematic designator C19)
C37 "0.1uF" "0402 slim-B" 1559.57,1383.63 r0 bottom locked
C38 "0.1uF" "0402 slim"#1 1441.46,1383.63 r180 bottom locked
C39 "0.1uF" "0402 slim"#3 1638.32,1304.89 r90 bottom locked
C40 "0.1uF" "0402 slim-B" 1598.95,1304.89 r90 bottom locked (schematic designator C4)
C41 "0.1uF" "0402 slim"#1 1520.2,1304.89 r90 bottom locked
C42 "0.1uF" "0402 slim"#1 1756.43,1344.26 r180 bottom locked
C43 "0.1uF" "0402 slim"#1 1441.46,1304.89 r180 bottom locked
C44 "0.1uF" "0402 slim"#4 1717.06,1304.89 r180 bottom locked
C45 "0.1uF" "0402 slim-B" 1756.43,1304.89 r270 bottom locked (schematic designator C16)
C46 "0.1uF" "0402 slim"#1 1638.32,1265.52 r180 bottom locked
C47 "0.1uF" "0402 slim"#1 1441.46,1265.52 r180 bottom locked
C48 "0.1uF" "0402 slim"#1 1480.83,1265.52 r270 bottom locked (schematic designator C23)
C49 "0.1uF" "0402 slim"#1 1835.17,1186.78 r135 bottom locked
C50 "0.1uF" "0402 slim"#5 1441.46,1226.15 r180 bottom locked
C51 "0.1uF" "0402 slim"#2 1874.54,1147.41 r90 bottom locked (schematic designator C20)
C52 "0.1uF" "0402 slim"#1 1756.43,1186.78 r270 bottom locked (schematic designator C9)
C53 "0.1uF" "0402 slim"#1 1677.69,1186.78 r270 bottom locked
C54 "0.1uF" "0402 slim"#1 1638.32,1186.78 r270 bottom locked
C55 "0.1uF" "0402 slim"#1 1559.57,1186.78 r270 bottom locked (schematic designator C21)
C56 "0.1uF" "0402 slim"#1 1520.2,1186.78 r270 bottom locked
C57 "0.1uF" "0402 slim"#1 1362.72,1147.41 r180 bottom locked (schematic designator C13)
C58 "0.1uF" "0402 slim-B" 1795.8,1147.41 r0 bottom locked (schematic designator C45)
C59 "10uF" 1206#2 1225,670 r90 bottom locked (schematic designator C1)
C60 "10uF" 1206#2 825,670 r90 bottom locked (schematic designator C4)
C61 "10uF" 1206#2 270,570 r90 bottom locked (schematic designator C37)
C62 "10uF" 1206#2 675,700 r270 bottom locked (schematic designator C38)
J1 "RJ45 - JACK L" "5558503-1 Quad RJ45 Jack" 3390,505 r0 top locked
J2 "RJ-11 SINGLE" "RJ11 - 5555140-1" 1335,55 r0 top locked (schematic designator J3)
J3 "RJ-11 SINGLE" "RJ11 - 5555140-1" 1950,55 r0 top locked
J4 "AVAGO" HFBR-2412Z 270,500 r270 top locked
J5 "AVAGO" HFBR-2412Z 790,500 r270 top locked
L1 "Inductor" 0805#1 1693,847.31 r0 top locked
L2 "Inductor" 0805#1 1459,846.31 r0 top locked
logo1 "logo" STARFLAKE 2410,705 r270 top locked
logo2 "logo" STARFLAKE 110,635 r0 top locked
logo3 "logo" STARFLAKE 2410,705 r90 bottom locked
logo4 "logo" STARFLAKE 110,635 r180 bottom locked
P1 "HEADER 5X2" HDR2X5 630,2890 r180 top locked
P2 "CAM_PORT" CON34_.05X.05 495,1995 r0 top locked
Q1 "BSN20" SOT23 1040,125 r180 bottom locked
Q2 "BSN20" SOT23 515,125 r180 bottom locked
R1 "715K" J1-0603 1328,2733 r90 top locked (schematic designator R16)
R2 "348K" J1-0603 1861,2729 r90 top locked (schematic designator R14)
R3 "348K" J1-0603 2375,2727 r90 top locked (schematic designator R18)
R4 "2.87K" J1-0603 1200,2501 r0 top locked (schematic designator R17)
R5 "673" "RES 0.3 x 0.025" 2427,2495 r180 top locked
R6 "1.15K" J1-0603 1730,2494 r0 top locked (schematic designator R15)
R7 "673" J1-0603 2238,2494 r0 top locked (schematic designator R19)
R8 "10K" "0402 slim"#6 1510,2115 r180 top locked
R9 "10K" "0402 slim"#7 1460,2070 r0 top locked
R10 "1K" "0402 slim"#7 585,2972 r180 bottom locked
R11 "1K" "0402 slim"#7 405,2972 r0 bottom locked
R12 "1K" "0402 slim"#7 270,2972 r0 bottom locked
R13 "100" "0402 slim"#8 2003,1619.85 r180 bottom locked (schematic designator R10)
R14 "100" "0402 slim"#9 1992.65,1501.74 r180 bottom locked (schematic designator R10)
R15 "100" "0402 slim"#1 1835.17,1462.37 r180 bottom locked (schematic designator R9)
R16 "100" "0402 slim"#10 2003,1383.31 r180 bottom locked (schematic designator R8)
R17 "100" "0402 one-of" 1953.28,1304.89 r135 bottom locked
R18 "100" "0402 slim"#11 2003.3,1344.31 r180 bottom locked (schematic designator R15)
R19 "100" "0402 slim"#9 1874.54,1344.26 r180 bottom locked (schematic designator R5)
R20 "100" "0402 slim"#11 1796,1294.31 r90 bottom locked
R21 "100" "0402 slim"#1 1717.06,1226.15 r180 bottom locked
R22 "100" "0402 slim"#11 1795.8,1057.31 r90 bottom locked
R23 "100" "0402 slim"#8 1835.16,1057.31 r90 bottom locked (schematic designator R62)
R24 "100" "0402 SLIM" 1717,1057.31 r90 bottom locked (schematic designator R20)
R25 "10K" 0805#1 1955,840 r270 bottom locked
R26 "10K" 0805#1 1875,840 r270 bottom locked
R27 "10" 0805#2 824,576 r270 bottom locked
R30 "3K3" 0805#3 640,85 r90 bottom locked
R31 "4K7" 0805#4 395,85 r90 bottom locked
R32 "3K3" 0805#3 1165,80 r90 bottom locked
R33 "4K7" 0805#3 915,80 r90 bottom locked
"TEST POINT 1" "1V8" TP-107#1 1632,3235 r0 top locked
"TEST POINT 2" "2V5" TP-107#1 2142,3235 r0 top locked
"TEST POINT 3" "1V2" TP-107#1 1093,3232 r0 top locked
"TEST POINT 4" "1V8" TP-107#2 1629,3233 r0 top locked
"TEST POINT 5" "CAM_FLD" TP-107#3 560,2215 r90 top locked
"TEST POINT 6" "1V2_VCCD" TP-107#4 455,790 r0 top locked
"TEST POINT 7" "GND" TP-107#1 435,3230 r180 bottom locked
"TEST POINT 8" "CAM_CLKA" TP-107#5 560,2475 r270 bottom locked
"TEST POINT 9" "GND" TP-107#1 810,1530 r180 bottom locked
"TEST POINT 10" "5V0" TP-107#6 675,1920 r270 bottom locked
"TEST POINT 11" "CAM_PCLK" TP-107#2 -135,1185 r0 bottom locked
"TEST POINT 12" "DGND" TP-107#4 520,980 r180 bottom locked
"TEST POINT 13" "2V5_VCCA" TP-107#4 1640,725 r180 bottom locked
"TEST POINT 14" "AGND" TP-107#4 120,175 r180 bottom locked
TP1 "SIP6" TP6 2765,3270 r0 top locked
TP2 "IO_8" TP1#1 235,2575 r180 top locked
TP3 "IO_8" TP1#2 290,2535 r180 top locked
TP4 "SIP17" TP17 670,1680.59 r0 top locked
TP5 "SIP17" TP17 110,1680.2 r0 top locked (schematic designator TP3)
TP6 "IO5" TP1#2 1170,2075 r180 top locked
TP7 "IO3" TP1#2 1270,2075 r180 top locked
TP8 "IO1" TP1#2 1370,2075 r180 top locked
TP9 "IO6" TP1#2 1170,1975 r0 top locked
TP10 "IO4" TP1#2 1270,1975 r0 top locked
TP11 "IO2" TP1#2 1370,1975 r0 top locked
TP12 "SIP6" TP6 2765,200 r0 top locked (schematic designator TP8)
U1 "TPS84410" QFN-N39 1272.05,2632.72 r90 top locked (schematic designator U3)
U2 "EP3C40F324C8N" FBGA324 1658,1403.31 r0 top locked
U3 "TPS84410" QFN-N39 1801.93,2627.6 r90 top locked
U4 "TPS84410" QFN-N39 2311.93,2627.6 r90 top locked (schematic designator U3)
U5 "SX1503" QFN-UT28 1591.43,2147.41 r270 top locked
U6 "LT1963AES8" SO8_L 470,615 r180 bottom locked (schematic designator U4)
U7 "LT1963AEST-2.5" "SOT-223 LT1963A" 1115,610 r90 bottom locked (schematic designator U6)

## Footprints (in the part's own frame and the unit in brackets; to place one, negate y for a bottom-side part, rotate by r counter-clockwise, add the part's x,y. Pads: shape width x height; smd on the part's side, far side on the other; paste and mask are expansions set on the pad)
"0402 one-of" [mil]
  rrect100% 25x20 / inner round 20 / far side rrect100% 20x20 hole 8: 1(0,0)
  rect 25x20 smd: 2(50,0)
  silkscreen extent 20,-8 30,8
"0402 slim"#1 [mil]
  rect 25x20 smd: 2(50,0)
  silkscreen extent 20,-8 27,8
"0402 slim"#2 [mil]
  rect 25x20 smd: 1(0,0) 2(50,0)
  silkscreen extent 24,-8 33,7
"0402 slim"#3 [mil]
  rect 25x18 smd: 1(0,0)
  rect 25x20 smd: 2(50,0)
  silkscreen extent 20,-6 26,7
"0402 slim"#4 [mil]
  rect 23x20 smd: 2(50.06,0)
  silkscreen extent 19,-6 25,6
"0402 slim"#5 [mil]
  rect 25x20 smd: 1(0,0)
  rect 25x20 / inner rect 20x20 / far side round 20 hole 8: 2(39.37,0)
  silkscreen extent 17,-7 22,8
"0402 slim"#6 [mil]
  rect 25x20 smd: 1(0,0)
  rect 25x20 hole 8: 2(50,0)
  silkscreen extent 20,-8 30,8
"0402 slim"#7 [mil]
  rect 25x20 hole 8: 1(0,0)
  rect 25x20 smd: 2(50,0)
  silkscreen extent 20,-7 30,8
"0402 slim"#8 [mil]
  rect 25x20 / inner round 20 / far side round 20 hole 8: 1(0,0)
  silkscreen extent 20,-8 30,8
"0402 slim"#9 [mil]
  rect 25x20 / inner round 20 / far side round 20 hole 8: 2(50,0)
  silkscreen extent 18,-8 27,8
"0402 slim"#10 [mil]
  rect 25x20 / inner round 20 / far side round 20 hole 8: 2(0,0)
  silkscreen extent 24,-8 32,8
"0402 slim"#11 [mil]
  rect 25x20 smd: 1(0,0)
  silkscreen extent 20,-8 30,8
"0402 SLIM" [mil]
  rect 25x20 smd: 1(0,0)
  silkscreen extent 20,-8 30,8
"0402 slim-B" [mil] "reversed pads"
  rect 25x20 smd: 1(50,0)
  silkscreen extent 20,-8 25,8
0805#1 [mil]
  rect 60x50 smd: 1(0,0) 2(90,0)
0805#2 [mil]
  rect 60x50 hole 20: 1(0,0) 2(90,0)
0805#3 [mil]
  rect 60x50 hole 8: 1(0,0)
  rect 60x50 smd: 2(90,0)
0805#4 [mil]
  rect 60x50 hole 8: 1(0,0) 2(90,0)
1206#1 [mil] "Chip Capacitor; Body 3.2 x 1.6 mm (LxW typ)"
  rect 60x60 hole 8: 1(0,0) 2(135,0)
  silkscreen extent -50,-50 185,50
1206#2 [mil]
  rect 60x60 hole 20: 1(0,0) 2(135,0)
  silkscreen extent -50,-50 185,50
"5558503-1 Quad RJ45 Jack" [mm]
  rect 1.5x1.5 hole 0.9: A1(-17.145,6.096) B1(-17.145,20.066) C1(-17.145,34.036) D1(-17.145,48.006)
  round 1.5 hole 0.9: A2(-19.685,7.366) A3(-17.145,8.636) A4(-19.685,9.906) A5(-17.145,11.176) A6(-19.685,12.446) A7(-17.145,13.716) A8(-19.685,14.986) B2(-19.685,21.336) B3(-17.145,22.606) B4(-19.685,23.876) B5(-17.145,25.146) B6(-19.685,26.416) B7(-17.145,27.686) B8(-19.685,28.956) C2(-19.685,35.306) C3(-17.145,36.576) C4(-19.685,37.846) C5(-17.145,39.116) C6(-19.685,40.386) C7(-17.145,41.656) C8(-19.685,42.926) D2(-19.685,49.276) D3(-17.145,50.546) D4(-19.685,51.816) D5(-17.145,53.086) D6(-19.685,54.356) D7(-17.145,55.626) D8(-19.685,56.896)
  round 3.556 hole 3.251 unplated: MH1(-10.795,4.826) MH2(-10.795,58.166)
  round 1.88 hole 1.575: MH3(-6.223,1.905) MH4(-6.223,61.087) MH5(-21.209,31.496)
  silkscreen extent -21.34,0 -1.68,63.12
CON34_.05X.05 [mil]
  rect 35x35 hole 22: 1(0,0)
  round 35 hole 22: 2(50,0) 3(0,-50) 4(50,-50) 5(0,-100) 6(50,-100) 7(0,-150) 8(50,-150) 9(0,-200) 10(50,-200) 11(0,-250) 12(50,-250) 13(0,-300) 14(50,-300) 15(0,-350) 16(50,-350) 17(0,-400) 18(50,-400) 19(0,-450) 20(50,-450) 21(0,-500) 22(50,-500) 23(0,-550) 24(50,-550) 25(0,-600) 26(50,-600) 27(0,-650) 28(50,-650) 29(0,-700) 30(50,-700) 31(0,-750) 32(50,-750) 33(0,-800) 34(50,-800)
  silkscreen extent -36,-835 84,33
FBGA324 [mil] "BGA, 324-Leads, Body 19x19mm, Pitch 1mm"
  round 20 / inner round 20 / far side round 19.68 hole 8: A1(-334.65,334.65) A2(-295.28,334.65) B10(19.69,295.28) B17(295.28,295.28) C4(-216.54,255.91) C6(-137.8,255.91) C8(-59.05,255.91) C11(59.06,255.91) C12(98.43,255.91) C13(137.8,255.91) C15(216.54,255.91) E3(-255.91,177.17) E11(59.06,177.17) F1(-334.65,137.8) F2(-295.28,137.8) F3(-255.91,137.8) F7(-98.43,137.8) F13(137.8,137.8) G3(-255.91,98.43) G6(-137.8,98.43) G16(255.91,98.43) H3(-255.91,59.06) H6(-137.8,59.06) H8(-59.05,59.06) H15(216.54,59.06) H18(334.65,59.06) J3(-255.91,19.69) J13(137.8,19.69) J14(177.17,19.69) J16(255.91,19.69) J17(295.28,19.69) J18(334.65,19.69) K3(-255.91,-19.68) K13(137.8,-19.68) N3(-255.91,-137.8) N8(-59.05,-137.8) N12(98.43,-137.8) N16(255.91,-137.8) N17(295.28,-137.8) N18(334.65,-137.8) P13(137.8,-177.17) P16(255.91,-177.17) R1(-334.65,-216.54) R5(-177.17,-216.54) R16(255.91,-216.54) R17(295.28,-216.54) R18(334.65,-216.54) T1(-334.65,-255.91) T5(-177.17,-255.91) T6(-137.8,-255.91) T7(-98.43,-255.91) T9(-19.68,-255.91) T10(19.69,-255.91) T11(59.06,-255.91) T12(98.43,-255.91) T14(177.17,-255.91) T15(216.54,-255.91) T16(255.91,-255.91) U2(-295.28,-295.28) U9(-19.68,-295.28) U10(19.69,-295.28) U16(255.91,-295.28) U18(334.65,-295.28) V2(-295.28,-334.65) V10(19.69,-334.65) V12(98.43,-334.65) V18(334.65,-334.65)
  round 20 smd: A3(-255.91,334.65) A4(-216.54,334.65) A5(-177.17,334.65) A6(-137.8,334.65) A7(-98.43,334.65) A8(-59.05,334.65) B4(-216.54,295.28) B5(-177.17,295.28) B6(-137.8,295.28) B15(216.54,295.28) B16(255.91,295.28) B18(334.65,295.28) C1(-334.65,255.91) C3(-255.91,255.91) C5(-177.17,255.91) C10(19.69,255.91) D1(-334.65,216.54) D3(-255.91,216.54) D10(19.69,216.54) D18(334.65,216.54) E1(-334.65,177.17) E2(-295.28,177.17) E16(255.91,177.17) E17(295.28,177.17) E18(334.65,177.17) G5(-177.17,98.43) G14(177.17,98.43) G17(295.28,98.43) H2(-295.28,59.06) H4(-216.54,59.06) H5(-177.17,59.06) H17(295.28,59.06) K5(-177.17,-19.68) K6(-137.8,-19.68) K18(334.65,-19.68) L1(-334.65,-59.06) L2(-295.28,-59.06) L3(-255.91,-59.06) L4(-216.54,-59.06) L5(-177.17,-59.06) L7(-98.43,-59.06) L14(177.17,-59.06) L18(334.65,-59.06) M2(-295.28,-98.43) M3(-255.91,-98.43) M5(-177.17,-98.43) M13(137.8,-98.43) N6(-137.8,-137.8) P2(-295.28,-177.17) P12(98.43,-177.17) R3(-255.91,-216.54) R8(-59.05,-216.54) R11(59.06,-216.54) R13(137.8,-216.54) T3(-255.91,-255.91) T8(-59.05,-255.91) T17(295.28,-255.91) U1(-334.65,-295.28) U5(-177.17,-295.28) U6(-137.8,-295.28) U12(98.43,-295.28) U15(216.54,-295.28) U17(295.28,-295.28) V1(-334.65,-334.65) V5(-177.17,-334.65) V6(-137.8,-334.65) V11(59.06,-334.65) V14(177.17,-334.65) V15(216.54,-334.65) V16(255.91,-334.65)
  round 20 hole 8: A9(-19.68,334.65) A10(19.69,334.65) A11(59.06,334.65) A12(98.43,334.65) A13(137.8,334.65) A14(177.17,334.65) A15(216.54,334.65) A16(255.91,334.65) A17(295.28,334.65) A18(334.65,334.65) B1(-334.65,295.28) B2(-295.28,295.28) B3(-255.91,295.28) B7(-98.43,295.28) B8(-59.05,295.28) B9(-19.68,295.28) B11(59.06,295.28) B12(98.43,295.28) B13(137.8,295.28) B14(177.17,295.28) C2(-295.28,255.91) C7(-98.43,255.91) C9(-19.68,255.91) C14(177.17,255.91) C16(255.91,255.91) C17(295.28,255.91) C18(334.65,255.91) D2(-295.28,216.54) D5(-177.17,216.54) D7(-98.43,216.54) D9(-19.68,216.54) D12(98.43,216.54) D14(177.17,216.54) D16(255.91,216.54) E4(-216.54,177.17) E5(-177.17,177.17) E6(-137.8,177.17) E7(-98.43,177.17) E8(-59.05,177.17) E9(-19.68,177.17) E10(19.69,177.17) E12(98.43,177.17) E13(137.8,177.17) E14(177.17,177.17) F5(-177.17,137.8) F8(-59.05,137.8) F9(-19.68,137.8) F11(59.06,137.8) F12(98.43,137.8) F15(216.54,137.8) F16(255.91,137.8) F17(295.28,137.8) F18(334.65,137.8) G1(-334.65,98.43) G2(-295.28,98.43) G9(-19.68,98.43) G12(98.43,98.43) G13(137.8,98.43) G15(216.54,98.43) H1(-334.65,59.06) H9(-19.68,59.06) H10(19.69,59.06) H11(59.06,59.06) H12(98.43,59.06) H13(137.8,59.06) H16(255.91,59.06) J1(-334.65,19.69) J2(-295.28,19.69) J5(-177.17,19.69) J6(-137.8,19.69) J8(-59.05,19.69) J9(-19.68,19.69) J10(19.69,19.69) J11(59.06,19.69) J15(216.54,19.69) K1(-334.65,-19.68) K8(-59.05,-19.68) K9(-19.68,-19.68) K10(19.69,-19.68) K11(59.06,-19.68) K15(216.54,-19.68) K16(255.91,-19.68) L6(-137.8,-59.06) L8(-59.05,-59.06) L9(-19.68,-59.06) L10(19.69,-59.06) L11(59.06,-59.06) L16(255.91,-59.06) M1(-334.65,-98.43) M7(-98.43,-98.43) M10(19.69,-98.43) M14(177.17,-98.43) M15(216.54,-98.43) M17(295.28,-98.43) N1(-334.65,-137.8) N2(-295.28,-137.8) N7(-98.43,-137.8) N10(19.69,-137.8) N11(59.06,-137.8) N13(137.8,-137.8) N14(177.17,-137.8) N15(216.54,-137.8) P1(-334.65,-177.17) P4(-216.54,-177.17) P6(-137.8,-177.17) P7(-98.43,-177.17) P8(-59.05,-177.17) P10(19.69,-177.17) P14(177.17,-177.17) P15(216.54,-177.17) P17(295.28,-177.17) P18(334.65,-177.17) R2(-295.28,-216.54) R4(-216.54,-216.54) R15(216.54,-216.54) T4(-216.54,-255.91) T18(334.65,-255.91) U3(-255.91,-295.28) U4(-216.54,-295.28) U7(-98.43,-295.28) U8(-59.05,-295.28) V3(-255.91,-334.65) V4(-216.54,-334.65) V7(-98.43,-334.65) V8(-59.05,-334.65) V9(-19.68,-334.65) V13(137.8,-334.65)
  round 20 / inner round 20 / far side rect 20x25 hole 8: D4(-216.54,216.54) D6(-137.8,216.54) D8(-59.05,216.54) D11(59.06,216.54) D13(137.8,216.54) D15(216.54,216.54) M6(-137.8,-98.43) M8(-59.05,-98.43) M12(98.43,-98.43) R6(-137.8,-216.54) R7(-98.43,-216.54) R9(-19.68,-216.54) R10(19.69,-216.54) R12(98.43,-216.54)
  round 20 / inner round 19.68 / far side rect 25x20 hole 8: D17(295.28,216.54) E15(216.54,177.17) F14(177.17,137.8) G18(334.65,98.43) H14(177.17,59.06) K17(295.28,-19.68) L15(216.54,-59.06) P11(59.06,-177.17)
  round 20 / inner round 20 / far side rect 25x20 hole 8: F4(-216.54,137.8) F6(-137.8,137.8) G4(-216.54,98.43) G7(-98.43,98.43) G10(19.69,98.43) H7(-98.43,59.06) J4(-216.54,19.69) J7(-98.43,19.69) J12(98.43,19.69) K4(-216.54,-19.68) K7(-98.43,-19.68) K12(98.43,-19.68) L12(98.43,-59.06) M4(-216.54,-98.43) M11(59.06,-98.43) N4(-216.54,-137.8) N9(-19.68,-137.8) R14(177.17,-216.54) T2(-295.28,-255.91) T13(137.8,-255.91)
  round 20 / inner round 20 / far side rect 20x20 hole 8: F10(19.69,137.8)
  round 20 / inner round 20 / far side round 0 hole 8: G8(-59.05,98.43) M9(-19.68,-98.43) M16(255.91,-98.43)
  round 20 / inner round 20 / far side rect 20x22 hole 8: G11(59.06,98.43)
  round 20 all layers, no hole: K2(-295.28,-19.68) V17(295.28,-334.65)
  round 20 / inner round 19.68 / far side round 20 hole 8: K14(177.17,-19.68)
  round 20 / inner round 19.68 / far side rect 20x25 hole 8: L13(137.8,-59.06) N5(-177.17,-137.8) U11(59.06,-295.28) U13(137.8,-295.28) U14(177.17,-295.28)
  round 20 / inner round 20 / far side rect 25x19 hole 8: L17(295.28,-59.06)
  round 20 / inner round 20 / far side round 18 hole 8: M18(334.65,-98.43)
  round 20 smd far side: P3(-255.91,-177.17)
  round 20 on Top Paste: P5(-177.17,-177.17)
  round 20 smd mask-10: P9(-19.68,-177.17)
  silkscreen extent -405,-374 374,374, body extent -376,-376 372,372, height 87
HDR2X5 [mil]
  rect 62x62 hole 35: 1(0,0)
  round 62 hole 35: 2(0,100) 3(100,0) 4(100,100) 5(200,0) 6(200,100) 7(300,0) 8(300,100) 9(400,0) 10(400,100)
  silkscreen extent -50,-50 450,150
HFBR-2412Z [mil] "Fiber Receiver"
  round 36 hole 22: 1(250,400) 2(250,300) 3(250,200) 4(250,100) 5(150,100) 6(150,200) 7(150,300) 8(150,400)
  silkscreen extent 0,0 500,500
J1-0603 [mm] "Chip Resistor, Body 1.6x0.8mm, IPC High Density"
  rect 0.7x0.9 smd: 1(-0.75,0)
  rect 0.7x0.9 hole 0.203: 2(0.75,0)
  silkscreen extent -0.2,-0.35 0.2,0.35, body extent -0.85,-0.48 0.85,0.48, height 0.9
QFN-N39 [mm] "TI TPS84410 Voltage Regulator"
  rect 1.7x1.6 hole 0.508: 1(-1.35,0.325) 11(8.65,0.325) 19(8.65,8.525) 29(-1.45,8.525) 37(0.95,4.875)
  rect 0.6x0.95 smd: 2(0,0) 3(0.9,0) 4(1.8,0) 6(3.6,0) 20(7.2,8.85) 21(6.3,8.85) 22(5.4,8.85) 23(4.5,8.85) 24(3.6,8.85) 25(2.7,8.85) 26(1.8,8.85) 27(0.9,8.85) 28(0,8.85)
  rect 0.6x0.95 hole 0.203: 5(2.7,0) 7(4.5,0) 8(5.4,0) 9(6.3,0) 10(7.2,0)
  rect 0.95x0.6 smd: 12(8.925,1.725) 13(8.925,2.625) 14(8.925,3.525) 15(8.925,4.425) 16(8.925,5.325) 17(8.925,6.225) 18(8.925,7.125) 35(-1.725,2.625)
  rect 0.95x0.6 hole 0.203: 30(-1.725,7.125) 31(-1.725,6.225) 32(-1.725,5.325) 33(-1.725,4.425) 34(-1.725,3.525) 36(-1.725,1.725)
  rect 3.1x2.35 hole 0.508: 38(5.9,2.6) 39(5.9,6.275)
  Top Layer region: -1.25,2.025 -2.2,2.025 -2.2,1.425 -1.25,1.425
  Top Layer region: -1.25,2.925 -2.2,2.925 -2.2,2.325 -1.25,2.325
  Top Layer region: -1.25,4.725 -2.2,4.725 -2.2,4.125 -1.25,4.125
  Top Layer region: -1.25,3.825 -2.2,3.825 -2.2,3.225 -1.25,3.225
  Top Layer region: -1.25,6.525 -2.2,6.525 -2.2,5.925 -1.25,5.925
  Top Layer region: -1.25,5.625 -2.2,5.625 -2.2,5.025 -1.25,5.025
  Top Layer region: -1.25,7.425 -2.2,7.425 -2.2,6.825 -1.25,6.825
QFN-UT28 [mil]
  oval 33x8 smd: 1(0,0)
  rect 33x8 smd: 2(0,16) 3(0,32) 4(0,48) 5(0,64) 6(0,80) 7(0,96) 15(156,96) 16(156,80) 17(156,64) 18(156,48) 19(156,32) 20(156,16) 21(156,0)
  rect 8x33 smd: 8(30,126) 9(46,126) 10(62,126) 11(78,126) 12(94,126) 13(110,126) 14(126,126) 22(126,-30) 23(110,-30) 24(94,-30) 25(78,-30) 26(62,-30) 27(46,-30) 28(30,-30)
  silkscreen extent -20,-48 170,140
"RES 0.3 x 0.025" [mil] "AXIAL RESISTOR"
  round 40 hole 28: 1(0,0) 2(300,0)
  silkscreen extent 30,-25 265,25
"RJ11 - 5555140-1" [mil] "RIGHT-ANGLE RJ11 CONNECTOR"
  rect 59.05x59.05 hole 35.43: 1(145,470)
  round 59.05 hole 35.43: 2(195,370) 3(245,470) 4(295,370) 5(345,470) 6(395,370)
  round 140 hole 128 unplated: MH1(70,120) MH2(470,120)
  round 74 hole 62: MH3(540,0) MH4(0,0)
  silkscreen extent -12,-85 550,518, body extent -10,-85 549,518, height 495
SO8_L [mm] "SOIC, 8-Leads, Body 4.9x3.9mm, Pitch 1.27mm, IPC High Density"
  rect 1.9x0.6 smd: 1(-2.35,1.905)
  oval 1.9x0.6 smd: 2(-2.35,0.635) 4(-2.35,-1.905)
  oval 1.9x0.6 hole 0.203: 3(-2.35,-0.635) 5(2.35,-1.905) 6(2.35,-0.635) 7(2.35,0.635) 8(2.35,1.905)
  silkscreen extent -2.48,-2.5 1,2.88, body extent -2,-2.5 2,2.5, height 1.75
SOT23 [mm] "SOT-23; 3 Leads; Body 3.0 x 2.6 mm, inc. leads (LxW max)"
  rect 0.85x1.3 smd: 1(-0.95,-1.1) 2(0.95,-1.1) 3(0,1.1)
  silkscreen extent -2.05,-1.22 1.28,1.1
"SOT-223 LT1963A" [mil]
  rect 59x39 hole 20: 1(-1.17,-0.45) 2(-1.17,-91)
  rect 59x129 hole 20: 2(248,-91)
  rect 59x39 smd: 3(-1.17,-181.55)
  silkscreen extent -6,-223 168,46, body extent 40,-223 186,41, height 67
STARFLAKE [mil]
  Multi-Layer lines w8: 0,-50 0,-30 ; 10,-40 0,-30 ; -10,-40 0,-30 ; 30,-30 10,-10 ; -30,-30 -10,-10 ; 0,-20 0,0 ; 40,-10 30,0 ; -40,-10 -30,0 ; 50,0 30,0 ; 20,0 0,0 ; -20,0 0,0 ; -50,0 -30,0 ; 40,10 30,0 ; 10,10 30,30 ; -10,10 -30,30 ; -40,10 -30,0 ; 0,20 0,0 ; 10,40 0,30 ; -10,40 0,30 ; 0,50 0,30
TC3528-1411 [mm] "Capacitor, SM Tantalum; Body 3.5 x 2.8 mm (LxW typ)"
  rect 2x2.2 hole 0.508: 1(-1.5,0) 2(1.5,0)
  silkscreen extent -2.82,-1.5 1.85,1.62
TP1#1 [mil] "Male Stand-off"
TP1#2 [mil] "Male Stand-off"
  rect 52x52 hole 38: 1(0,0)
TP6 [mil] "Test Point 6"
  rect 52x52 hole 38: 1(0,0)
  round 52 hole 38: 2(100,0) 3(200,0) 4(300,0) 5(400,0) 6(500,0)
  silkscreen extent -50,-50 550,50
TP17 [mil] "Test Point 17"
  rect 50x50 hole 32: 1(0,799.21)
  round 50 hole 32: 2(0,699.8) 3(0,599.41) 4(0,500) 5(0,399.61) 6(0,299.21) 7(0,199.8) 8(0,99.41) 9(0,0) 10(0,-100.39) 11(0,-200.79) 12(0,-300.2) 13(0,-400.59) 14(0,-500) 15(0,-600.39) 16(0,-700.79) 17(0,-800.2)
TP-107#1 [mil]
  rect 150x85 hole 20: ""(0,0)
TP-107#2 [mil]
TP-107#3 [mil]
  rect 150x85 smd: "TEST POINT 9"(0,0)
TP-107#4 [mil]
  rect 150x85 hole 20: 1(0,0)
TP-107#5 [mil]
  rect 150x85 smd far side: CAM_CLK_A(0,0)
TP-107#6 [mil]
  rect 85x150 hole 20: ""(585,-135)

## Part data
C1 C2 C3 C4 C5 C6 C7 C8 C9 C10 C11 C12 C59 C60 C61 C62: library part "Cap Pol3", "Polarized Capacitor (Surface Mount)"
C14 C17 C18 C19 C20 C21 C23 C24 C26 C27 C28 C32 C36 C40 C42 C45 C48 C51 C52 C55 C57 C58: library part "Cap Semi", "Capacitor (Semiconductor SIM Model)"
J1: "A31470-ND CONN MOD JACK 4PORT 8-8 SHLD PCB"
J2 J3: "RJ-11 JACK"
P2: library part "Header 17X2", "Header, 17-Pin, Dual row"
R1 R2 R3 R4 R6 R7: library part Res3, "Resistor"
R10 R11 R12 R13 R14 R15 R16 R18 R19 R23 R24: library part RES1
TP1 TP12: library part TP6, "Samtec TSW-150-07-G-S"
TP4 TP5: library part TP17, "Samtec TSW-150-07-G-S"
U2: "Cyclone III Family FPGA, 195 I/O Pins, 4 PLLs, 324-Pin FBGA, Speed Grade 8, Commercial Grade, Pb-Free"
U5: "i2C LV GPIO"
U6: library part LT1963A

## Free pads (board coordinates)
  round 200 hole 156.5 mask+0: 1(150,3095) 2(2950,3095) 3(2950,395) 4(150,395)
  round 20 hole 8: P5(1480.83,1226.15)

## Via types
v1: diameter 20, hole 8, Top Layer to Bottom Layer, 60 vias
v2: diameter 20, hole 8, Top Layer to Bottom Layer, tented bottom, 1 vias

## Nets (pads, with @x,y where several pads share a name; then routed paths per layer and width w, separated by ;. In a path a pad name is that pad's centre, name@x,y a point inside that pad or via, vN(x,y) a via of type N, cw(c..) or ccw(c..) an arc to the next point about the centre after c; other vN are vias at no path point)
1V2: "TEST POINT 3." C1.1 C4.1 C39.1 U1.8 U1.9 U1.10 U1.11 U1.12 U1.13 U1.14 U1.36 U1.38 U2.F6 U2.F8 U2.F10 U2.F12 U2.G7 U2.G8 U2.G10 U2.G11 U2.G12 U2.G13 U2.H7 U2.H12 U2.J7 U2.J12 U2.K7 U2.K12 U2.L7 U2.L12 U2.M6 U2.M7 U2.M8 U2.M9 U2.M11 U2.M12 U2.N7 U2.N9 U2.N11 U2.N13 | length 3682.9
  Top Layer w6: v1(1075,1810) v1(1075,1890) ; U1.14@1133.27,2984.09 U1.13@1168.7,2984.09 U1.12@1204.13,2984.09 ; U2.M7@1559.57,1304.89 U2.L7@1559.57,1344.26 ; U2.G10@1677.69,1501.74 U2.G11@1717.06,1501.74 U2.G12@1756.43,1501.74
  Top Layer w20: U1.12@1204.13,2984.09 1248.43,2984.09 U1.11@1259.25,2973.27 ; U1.11@1246.45,2973.27 U1.11@1259.25,2973.27 ; U1.8@1272.05,2845.32 U1.9@1272.05,2880.75 U1.10@1272.05,2916.18 1272.05,2937.95 1259.25,2950.75 U1.11@1259.25,2973.27
  Mid-Layer 1 w6: v1(1571,954) 1571,981.43 1578.57,989 1578.57,1246.52 U2.N7@1559.57,1265.52 U2.M7@1559.57,1304.89 U2.K7@1559.57,1383.63 U2.J7@1559.57,1423 U2.H7@1559.57,1462.37 U2.G7@1559.57,1501.74 U2.G8@1598.95,1501.74 U2.F8@1598.95,1541.11 ; U2.N9@1638.32,1265.52 U2.M9@1638.32,1304.89 1650.82,1304.89 1669.82,1323.89 1685.56,1323.89 1704.56,1304.89 U2.M11@1717.06,1304.89 U2.N11@1717.06,1265.52 1729.56,1265.52 1748.56,1284.52 1764.3,1284.52 1783.3,1265.52 U2.N13@1795.8,1265.52 ; U2.F10@1677.69,1541.11 U2.G10@1677.69,1501.74 U2.G11@1717.06,1501.74 U2.G12@1756.43,1501.74 ; 1756.43,1285.09 U2.M12@1756.43,1304.89 ; U2.K12@1756.43,1383.63 U2.J12@1756.43,1423 U2.H12@1756.43,1462.37 U2.G12@1756.43,1501.74 ; U2.F12@1756.43,1541.11 U2.G12@1756.43,1501.74 ; U2.G13@1795.8,1501.74 U2.G12@1756.43,1501.74
  Mid-Layer 2 w6: v1(930,1230) 962,1230 ; v1(965,1085) 965,1242.89 1008,1285.89 1449.33,1285.89 1468.33,1304.89 U2.M6@1520.2,1304.89 U2.M7@1559.57,1304.89 ; U2.F6@1520.2,1541.11 U2.G7@1559.57,1501.74 ; U2.N7@1559.57,1265.52 U2.M7@1559.57,1304.89 ; U2.N9@1638.32,1265.52 U2.M9@1638.32,1304.89 ; U2.F10@1677.69,1541.11 U2.G10@1677.69,1501.74 1665.19,1501.74 1646.19,1520.74 1630.45,1520.74 1611.45,1501.74 U2.G8@1598.95,1501.74 U2.G7@1559.57,1501.74 ; U2.N11@1717.06,1265.52 U2.M11@1717.06,1304.89 1704.56,1304.89 1685.56,1285.89 1669.82,1285.89 1650.82,1304.89 U2.M9@1638.32,1304.89 ; U2.M12@1756.43,1304.89 U2.N13@1795.8,1265.52 ; U2.K12@1756.43,1383.63 U2.J12@1756.43,1423 U2.H12@1756.43,1462.37 1760.9,1462.37 1795.8,1497.27 U2.G13@1795.8,1501.74 ; U2.G12@1756.43,1501.74 U2.F12@1756.43,1541.11 ; U2.M7@1559.57,1304.89 U2.K7@1559.57,1383.63 U2.J7@1559.57,1423 U2.H7@1559.57,1462.37 U2.G7@1559.57,1501.74 ; U2.M7@1559.57,1304.89 U2.M8@1598.95,1304.89 U2.M9@1638.32,1304.89
  Bottom Layer w6: U2.M11@1717.06,1304.89 U2.M12@1756.43,1304.89 U2.L12@1756.43,1344.26 U2.K12@1756.43,1383.63 ; U2.J12@1746,1423 U2.J12@1756.43,1423 ; U2.H12@1756.43,1462.37 U2.G12@1756.43,1501.74
  Bottom Layer w8: 1776.43,1255.81 1809.39,1255.81 1815.17,1261.59
1V2_VCCD: "TEST POINT 6.1" C62.1 L2.1 U6.1 U6.2 | length 1448
  Top Layer w40: 455,790 665,790 675,800 ; C62.1@675,700 675,800 ; L2.1@1459,846.31 1334.05,971.27 760,971.27 735,946.27 735,860 675,800
  Bottom Layer w20: U6.2@562.52,640 U6.1@562.52,690 633,690 643,700 C62.1@675,700
1V8: "TEST POINT 1." C2.1 C5.1 C13.2 Q1.1 Q2.1 R8.2 R9.1 R31.1 R33.1 U2.D4 U2.D6 U2.D8 U2.D11 U2.D13 U2.D15 U2.R6 U2.R7 U2.R9 U2.R10 U2.R12 U2.R14 U2.T2 U3.8 U3.9 U3.10 U3.11 U3.12 U3.13 U3.14 U3.36 U3.38 U5.4 U5.12 U5.18 | length 2725
  Top Layer w6: R9.1@1460,2070 R8.2@1460,2115 ; U2.R6@1520.2,1186.78 U2.R7@1559.57,1186.78 ; U5.18@1639.43,1991.41 v1(1639.43,2057) ; U5.4@1639.43,2147.41 v1(1639.43,2057) ; U3.14@1663.15,2978.98 U3.13@1698.58,2978.98 U3.12@1734.02,2978.98 1778.31,2978.98 U3.11@1789.13,2968.15 ; U3.38@1699.57,2859.88 1699.57,2878.58 U3.11@1767.99,2947.01 ; U5.12@1717.43,2053.41 1702.41,2053.41 1699.41,2056.41 1697.2,2056.41 1696.61,2057 v1(1639.43,2057) ; 1744,2949 1766,2949 U3.11@1767.99,2947.01 ; 1770,2924 U3.11@1770,2945 ; U3.8@1801.93,2840.2 U3.9@1801.93,2875.63 U3.10@1801.93,2911.06 1801.93,2955.35 U3.11@1789.13,2968.15 ; U3.11@1767.99,2947.01 U3.11@1789.13,2968.15
  Top Layer w10: U3.36@1734.02,2559.69 1734.02,2656.02 1759,2681 1759,2807.9
  Mid-Layer 2 w6: U2.T2@1362.72,1147.41 1407.41,1147.41 1427,1167 1500.43,1167 U2.R6@1520.2,1186.78
  Mid-Layer 4 w10: U2.D6@1520.2,1619.85 U2.D6@1520.85,1619.85
  Bottom Layer w6: R31.1@395,85 395,56 421,30 536,30 552.4,46.4 Q2.1@552.4,81.69 ; R33.1@915,80 915,43 930,28 1059.4,28 1077.4,46 Q1.1@1077.4,81.69 ; U2.D4@1441.46,1619.85 1451.14,1619.85 1472.14,1640.85 1499.2,1640.85 U2.D6@1520.2,1619.85 1539.2,1638.85 1567.44,1638.85 1586.44,1619.85 U2.D8@1598.95,1619.85 1611.45,1619.85 1630.45,1638.85 1646.19,1638.85 1665.19,1619.85 U2.D11@1717.06,1619.85 1729.56,1619.85 1748.56,1638.85 1764.3,1638.85 1783.3,1619.85 U2.D13@1789.55,1626.1 ; U2.D13@1795.8,1619.85 1814.8,1638.85 1843.04,1638.85 1862.04,1619.85 U2.D15@1874.54,1619.85
  Bottom Layer w10: v1(999,1434) 1141,1576 1357,1576 1400.85,1619.85 U2.D4@1441.46,1619.85
2V5: "TEST POINT 2." C3.1 C6.1 C22.2 C31.2 C35.1 C51.2 U2.F4 U2.F16 U2.G4 U2.G15 U2.J4 U2.J15 U2.K4 U2.K15 U2.M4 U2.M15 U2.N4 U2.R15 U2.T13 U4.8 U4.9 U4.10 U4.11 U4.12 U4.13 U4.14 U4.36 U4.38 | length 1278.8
  Top Layer w6: U4.14@2173.15,2978.98 U4.13@2208.58,2978.98 U4.12@2244.02,2978.98 2288.31,2978.98 U4.11@2299.13,2968.15 2311.93,2955.35 U4.10@2311.93,2911.06 U4.9@2311.93,2875.63 U4.8@2311.93,2840.2
  Top Layer w8: U2.G15@1874.54,1501.74 U2.F16@1913.91,1541.11
  Mid-Layer 1 w8: U2.N4@1441.46,1265.52 U2.M4@1441.46,1304.89 U2.K4@1441.46,1383.63 U2.J4@1441.46,1423 U2.G4@1441.46,1501.74 U2.F4@1441.46,1541.11
  Mid-Layer 2 w8: U2.J4@1436.65,1423 U2.J4@1441.46,1423 ; U2.M15@1874.54,1304.89 1854.69,1324.73 1854.69,1352.48 1874.54,1372.32 U2.K15@1874.54,1383.63 U2.J15@1874.54,1423
  Mid-Layer 4 w6: U2.K4@1441.46,1383.63 1532.7,1383.63 1551.7,1402.63 1854.17,1402.63 U2.J15@1874.54,1423
  Mid-Layer 4 w8: U2.G15@1874.54,1501.74 U2.F16@1913.91,1541.11
  Bottom Layer w8: U2.K15@1874.54,1383.63 U2.J15@1874.54,1423
2V5_VCCA: "TEST POINT 13.1" C60.1 L1.1 P1.4 R11.1 R12.1 U7.3 | length 4526.4
  Top Layer w25: 1640,725 1640,794.31 L1.1@1693,847.31
  Mid-Layer 2 w8: R11.1@405,2972 R12.1@270,2972 176,2972 102.5,2898.5 102.5,2715 ; P1.4@530,2790 455,2715 102.5,2715 ; C60.1@825,670 617,878 398,878 203,1073 203,2534 102.5,2634.5 102.5,2715
  Bottom Layer w25: C60.1@825,660 876.17,608.83 U7.3@933.45,608.83 933.45,673.45 1000,740 1350,740 1365,725 1640,725